# Altium PCB mini_backplane.PcbDoc (part 1 of 5)
Units mm, origin at the board's own origin, x right, y up, seen from the top; angles counter-clockwise.
Board outline 232.03 x 195 mm, 4 copper layers (Top Layer, GND, POWER, Bottom Layer); 241 components, 200 nets, 1637 pads, 676 vias.
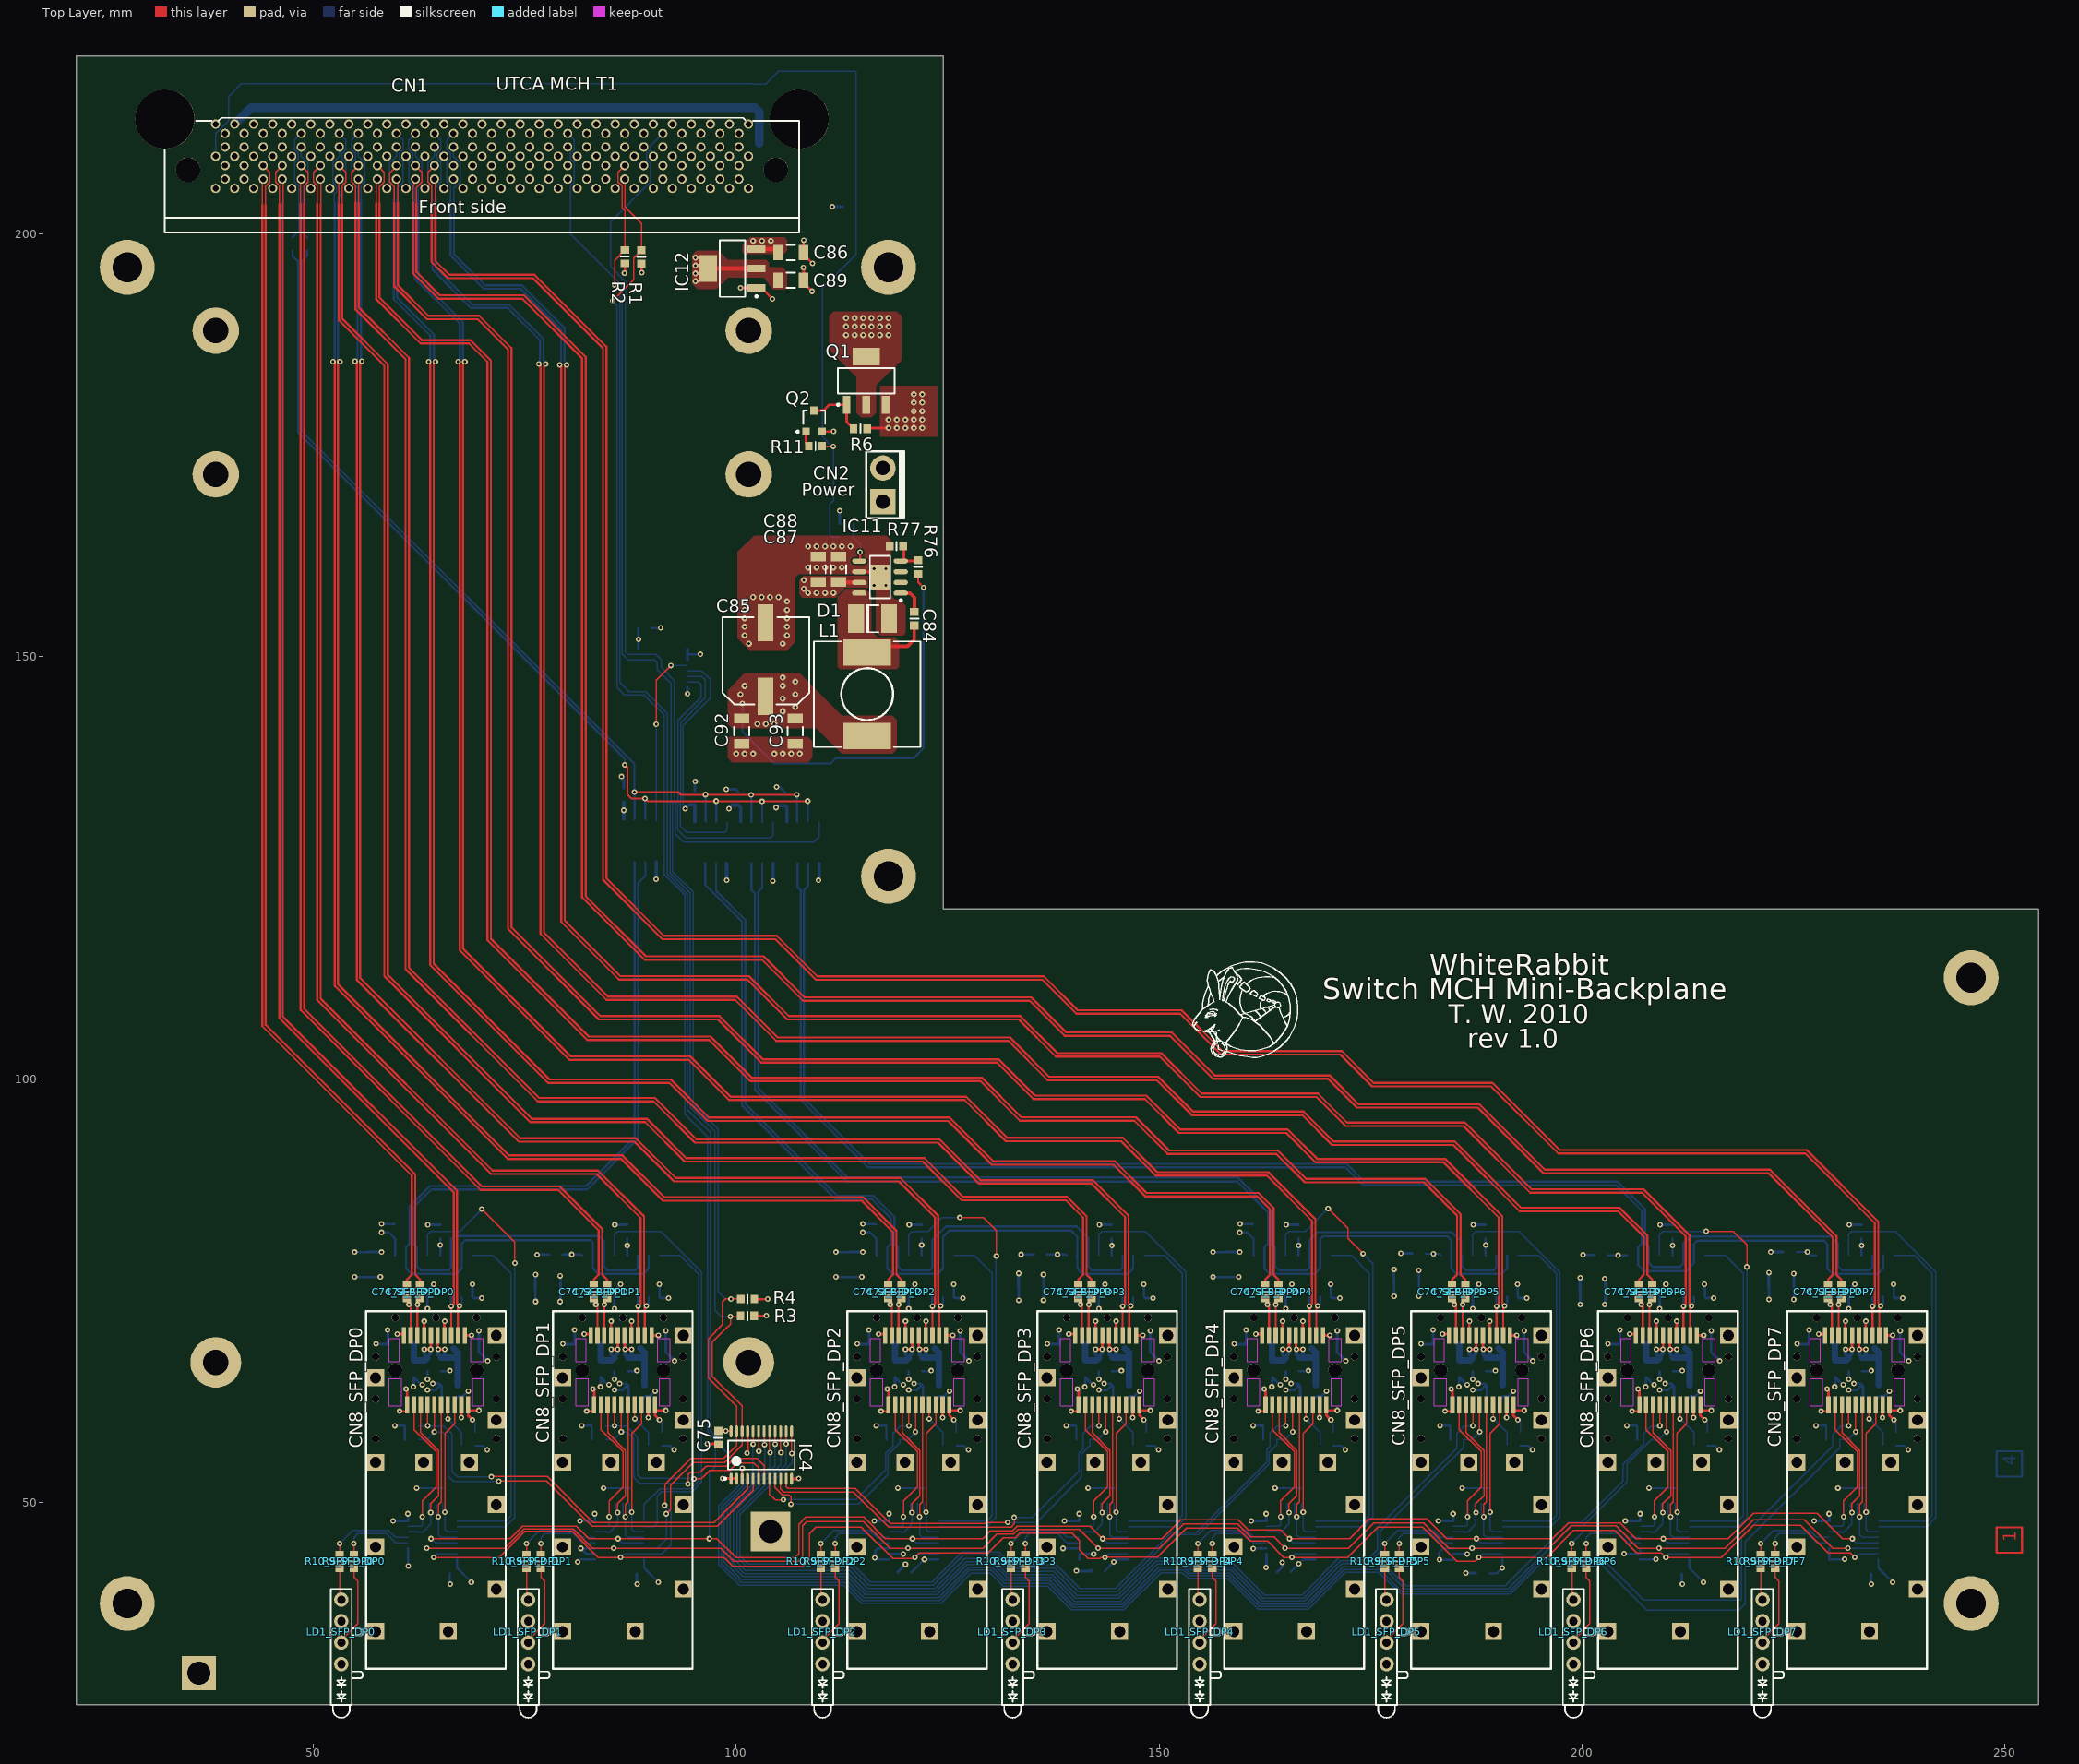
[diagram p0: Top Layer view]
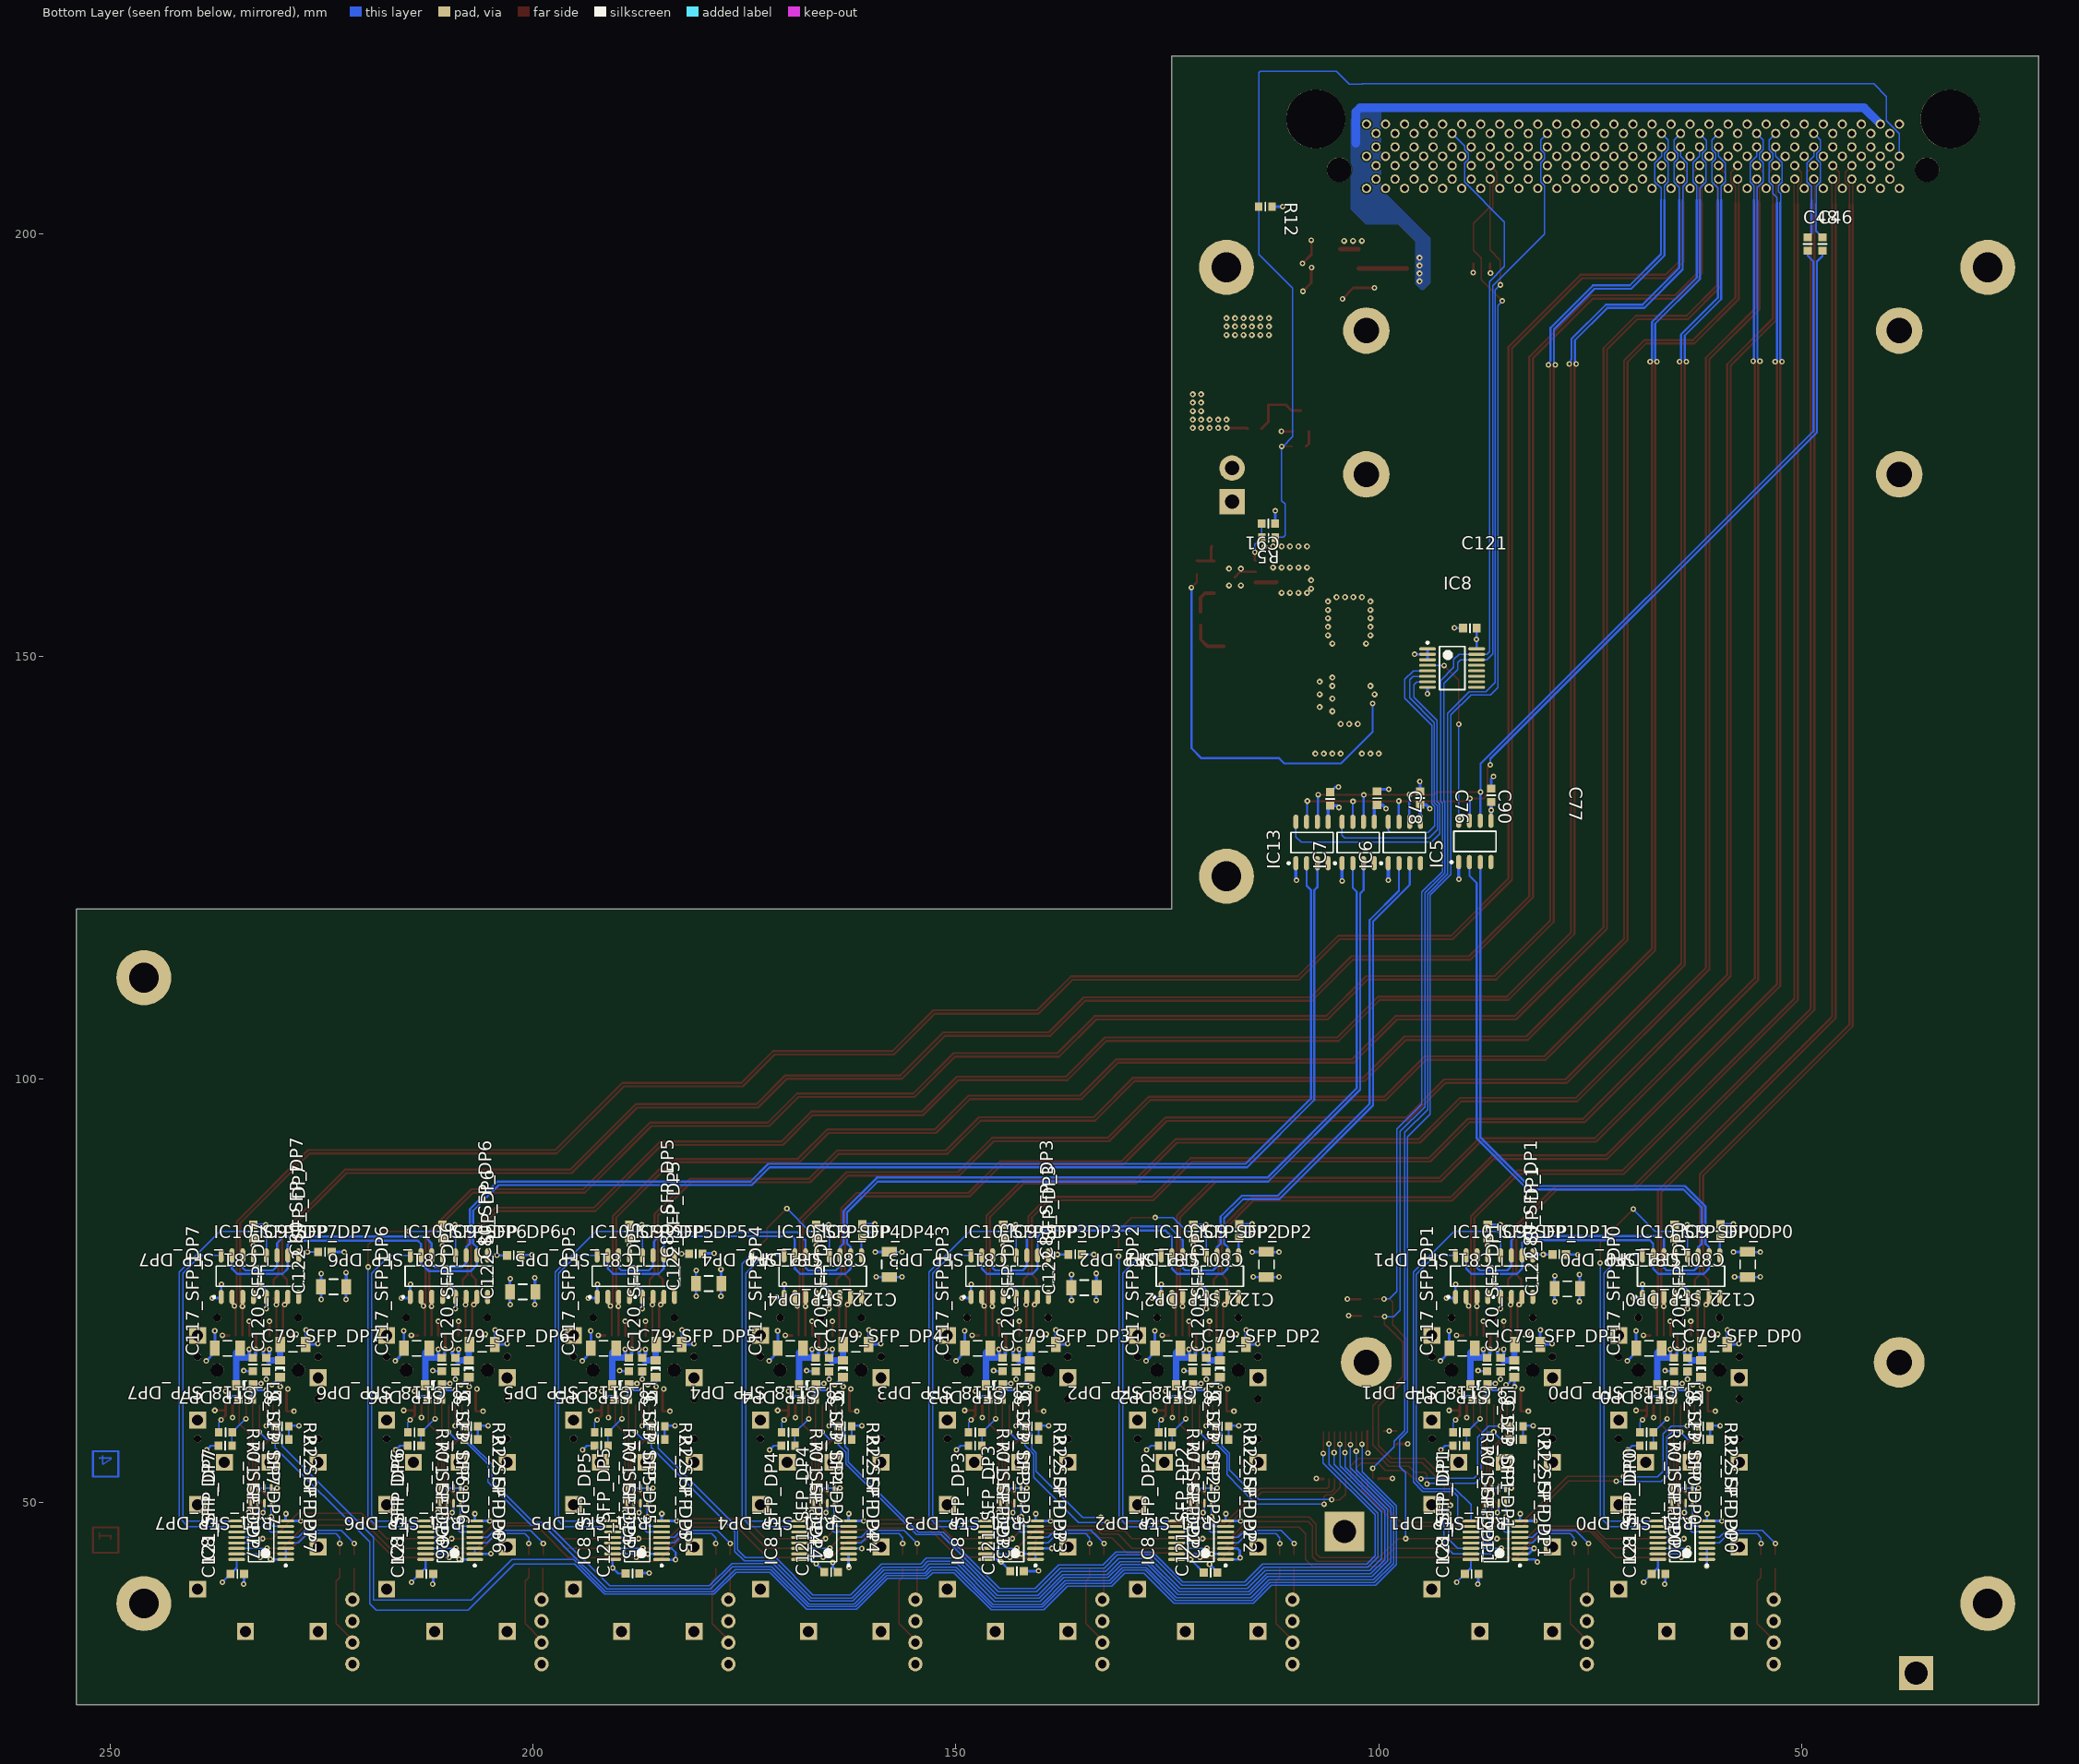
[diagram p1: Bottom Layer view, seen from below]
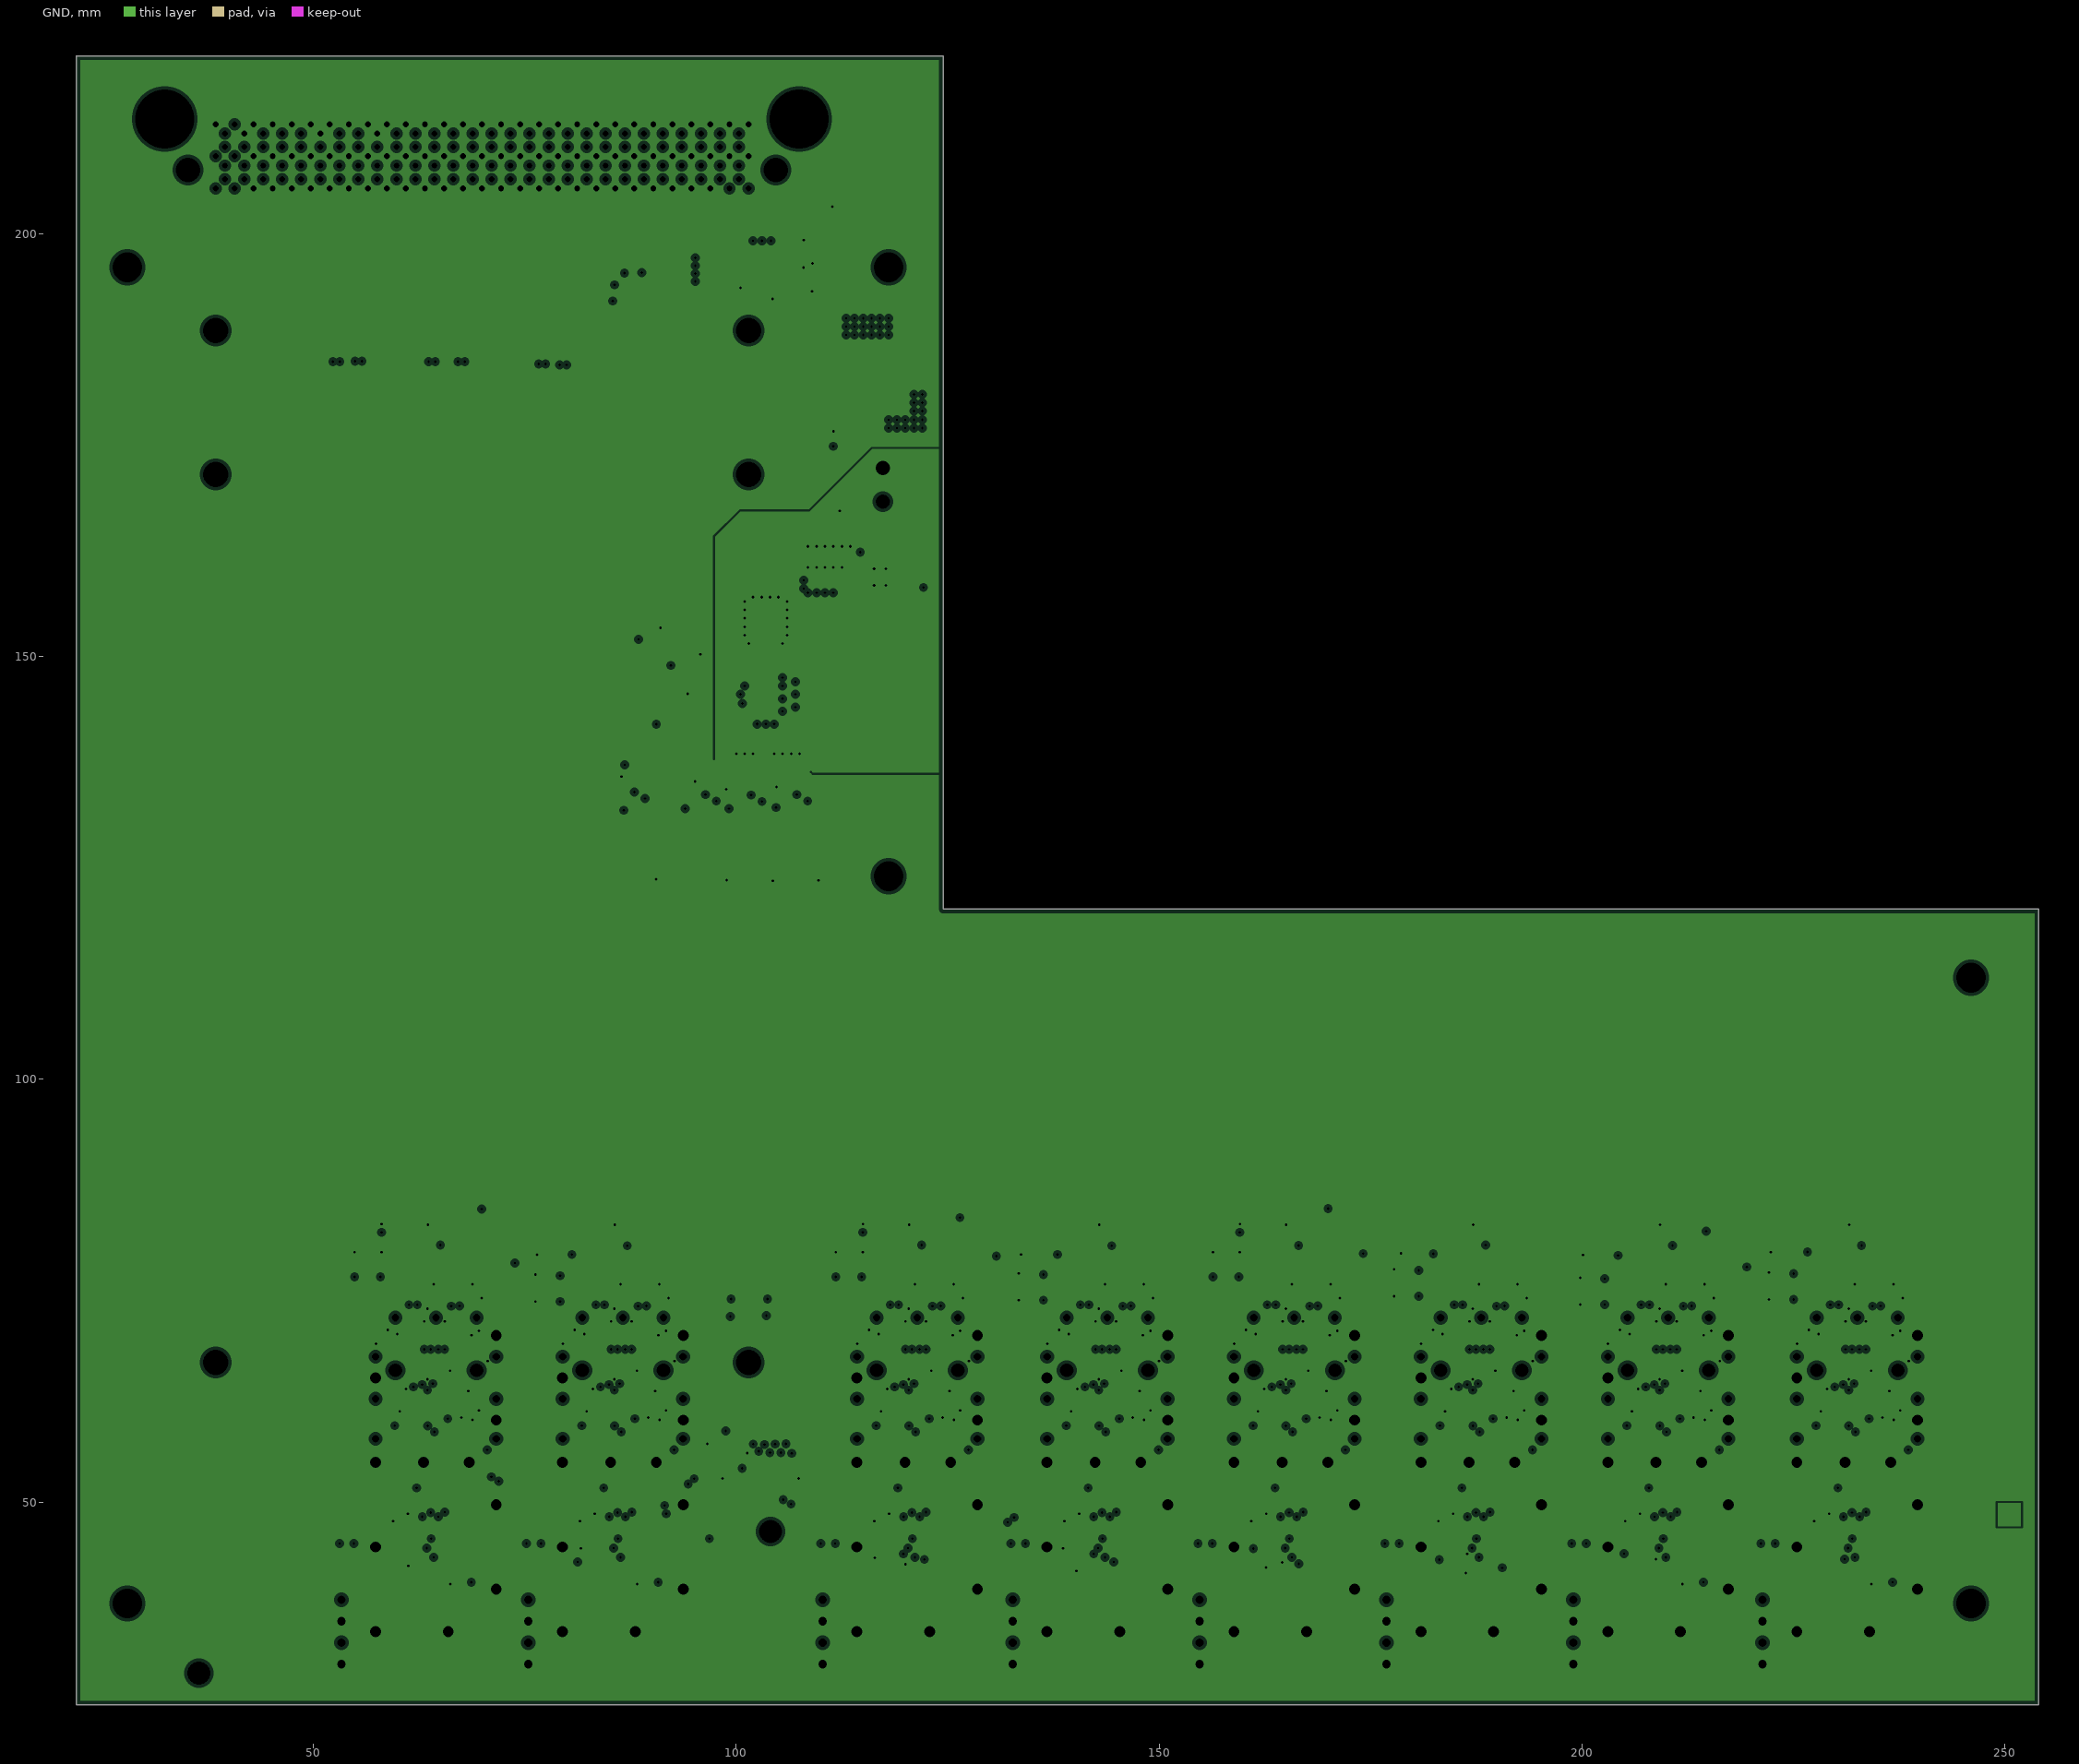
[diagram p2: GND, clearances drawn from the general rule]
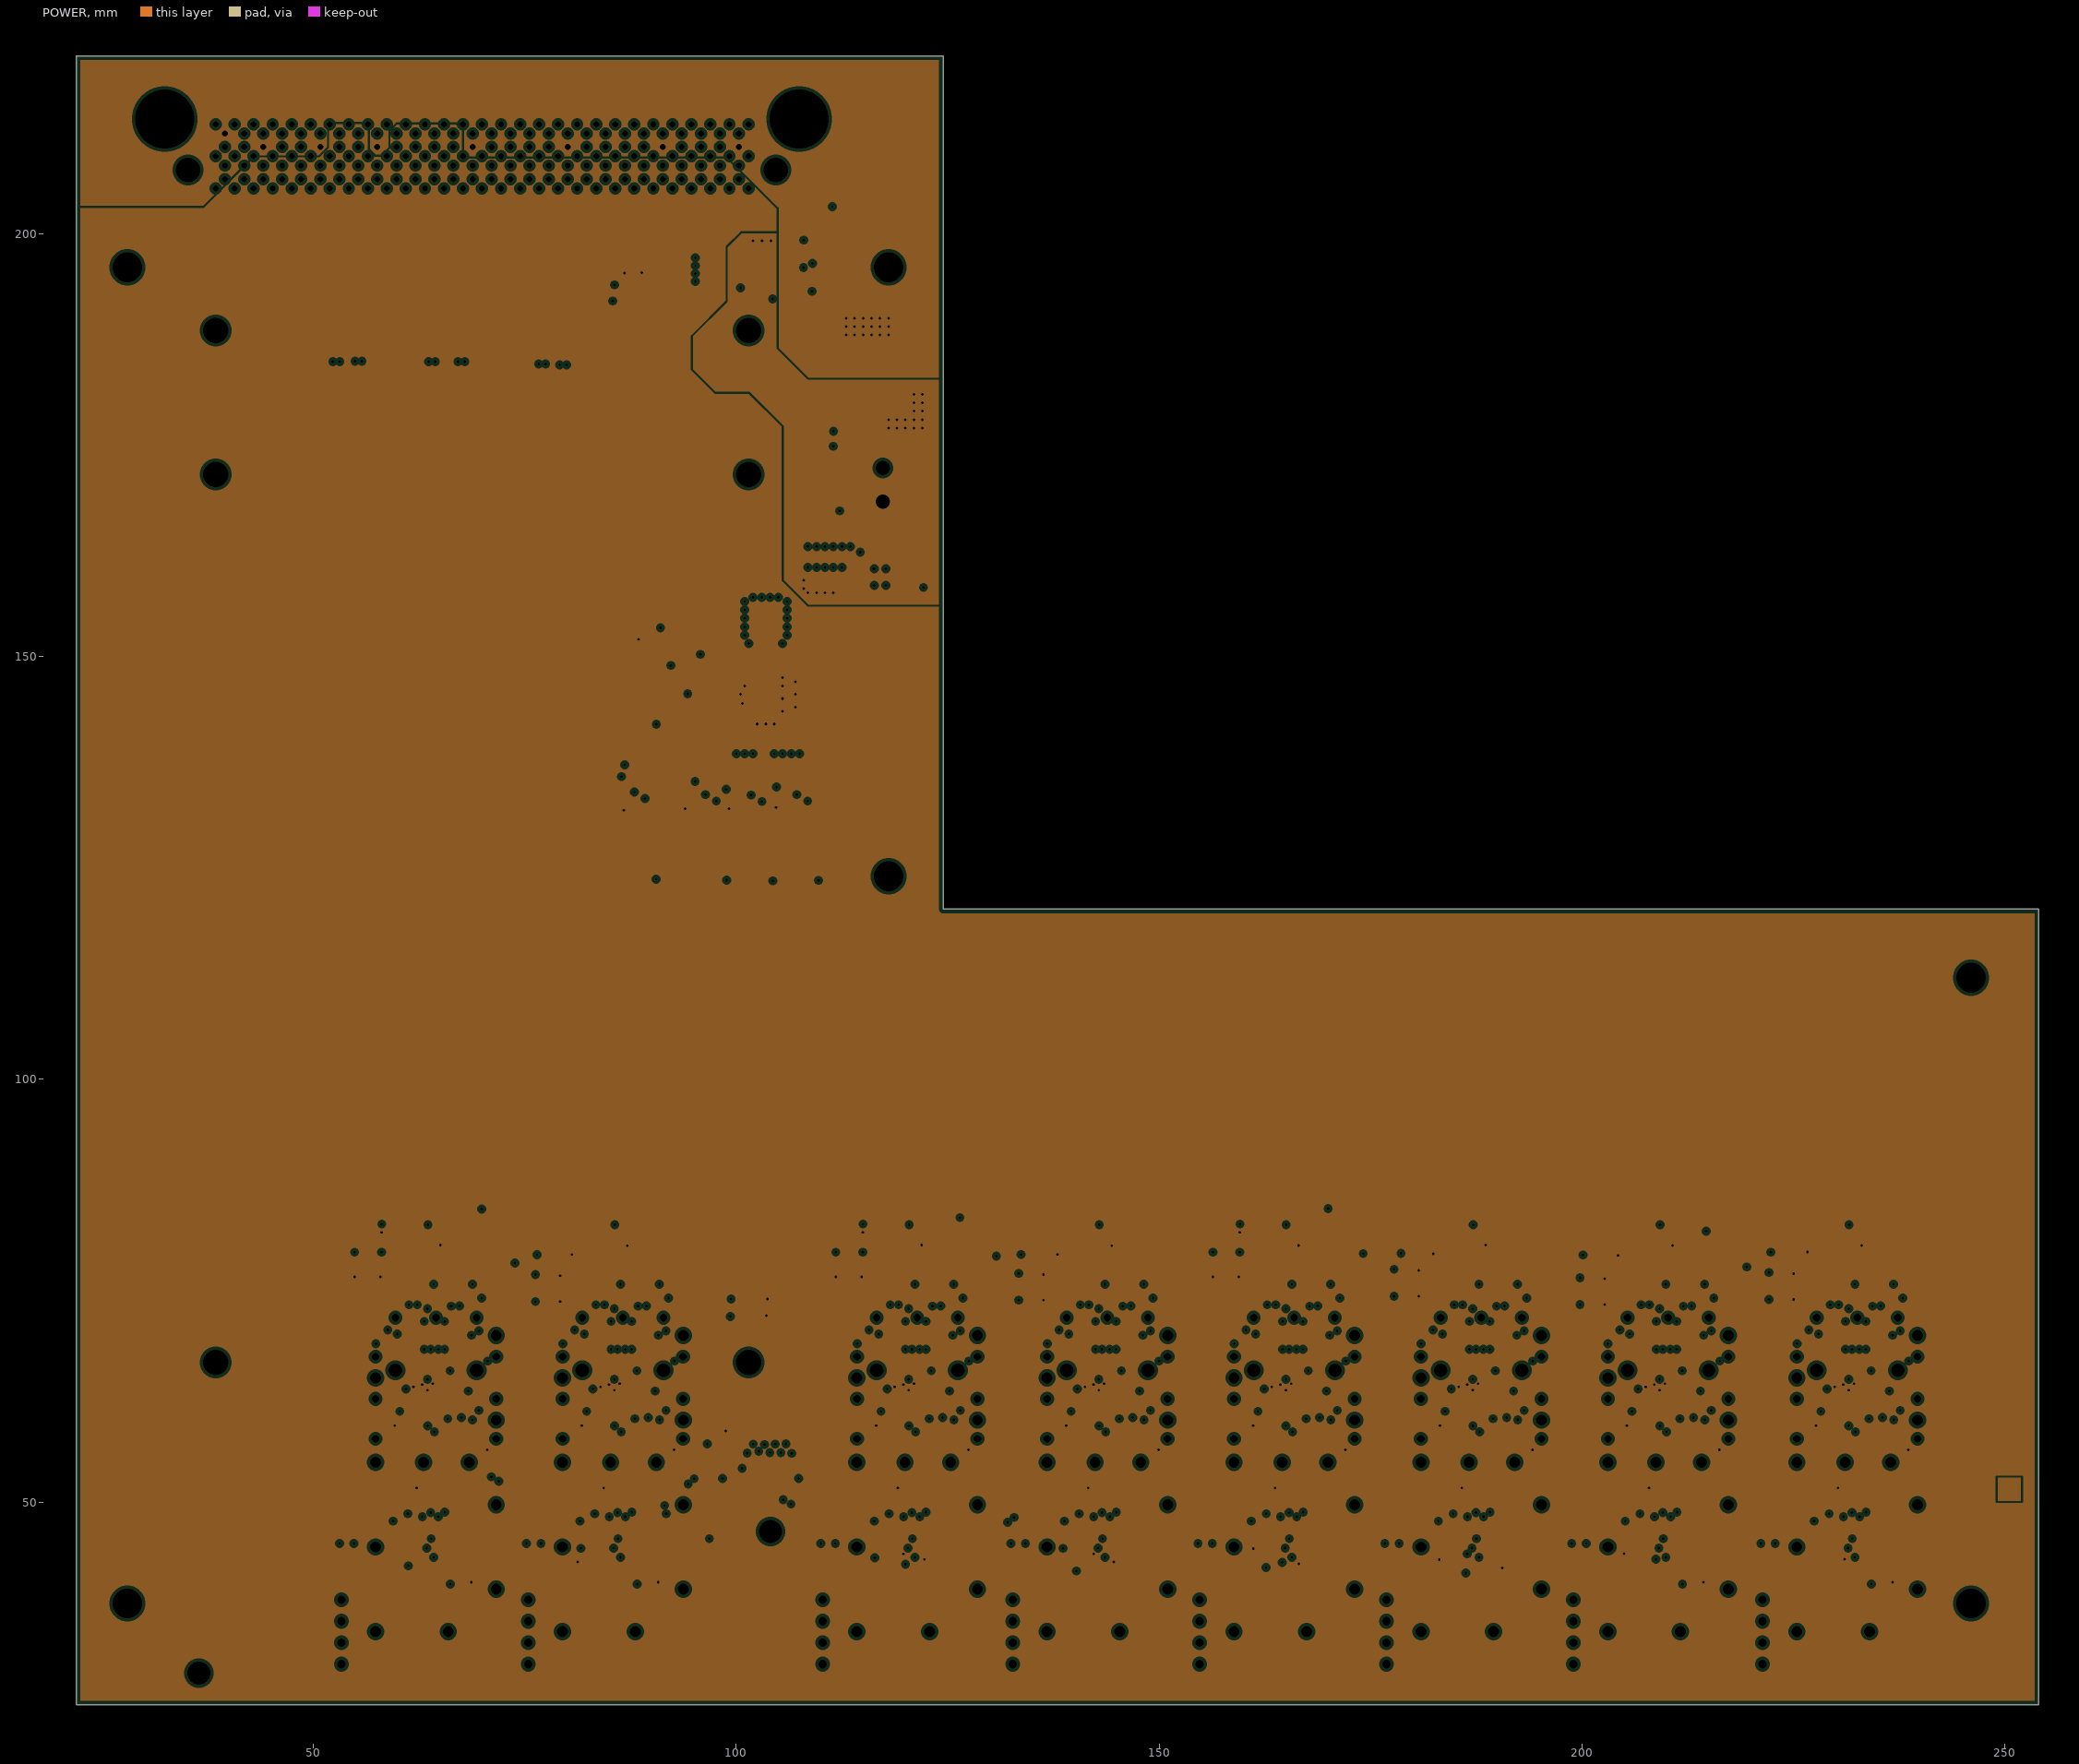
[diagram p3: POWER, clearances drawn from the general rule]
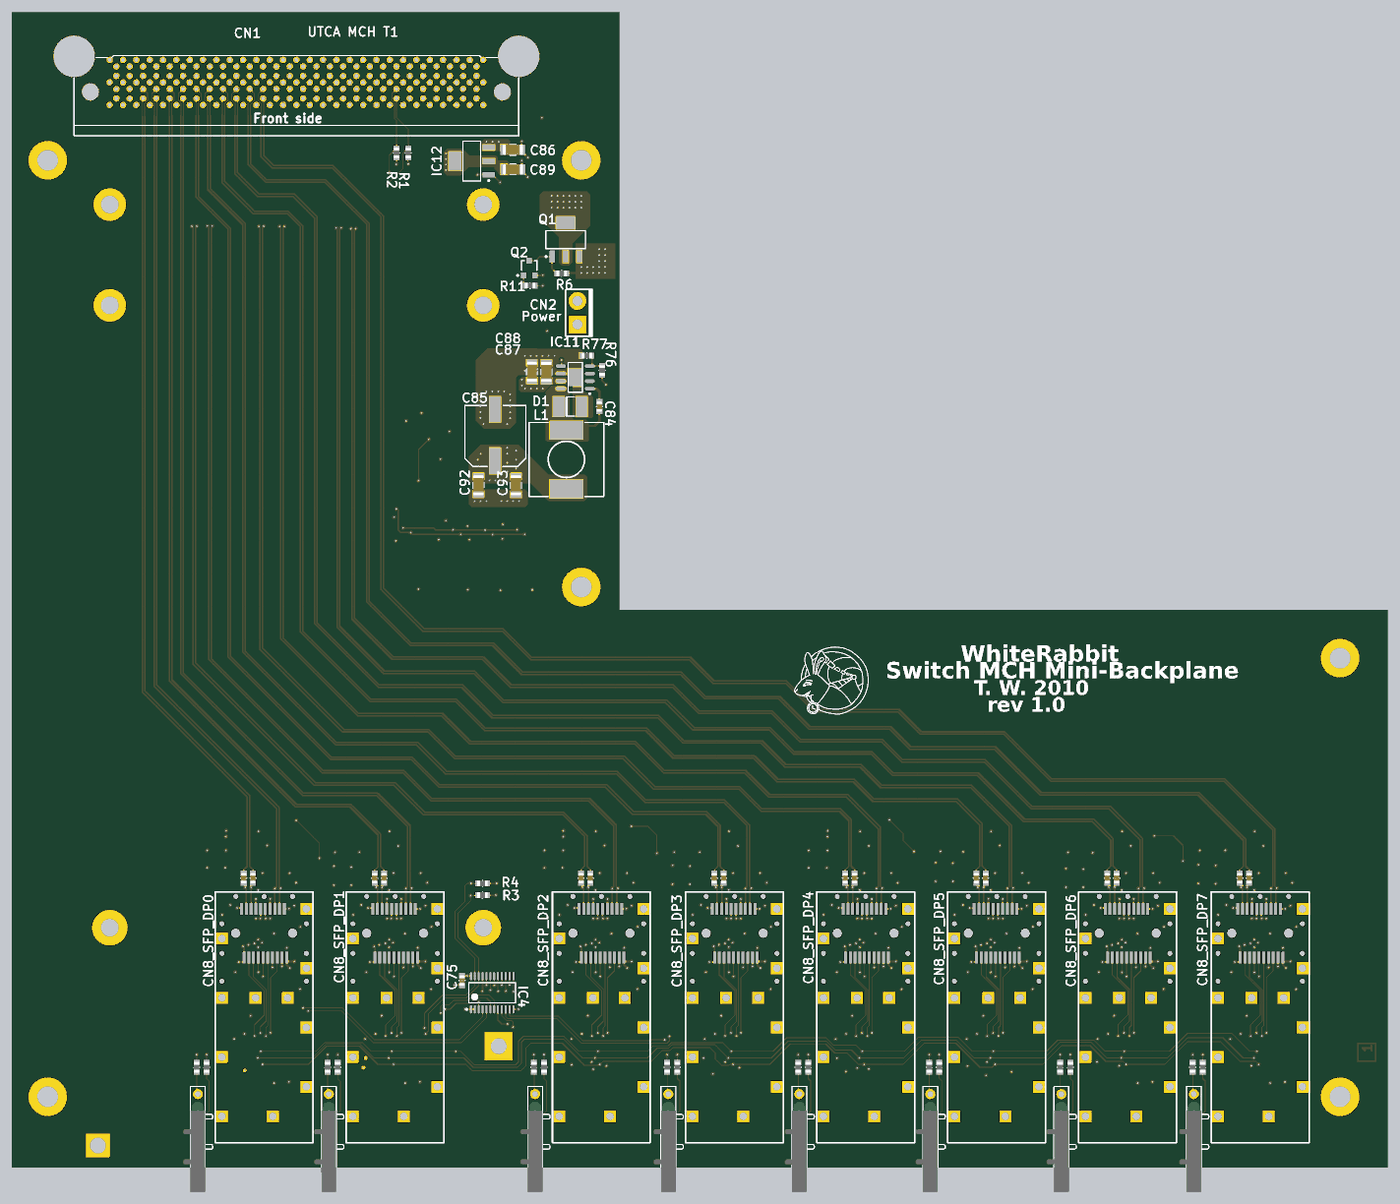
[diagram p8: 3D render of the assembled board from above, using the file's embedded part models]
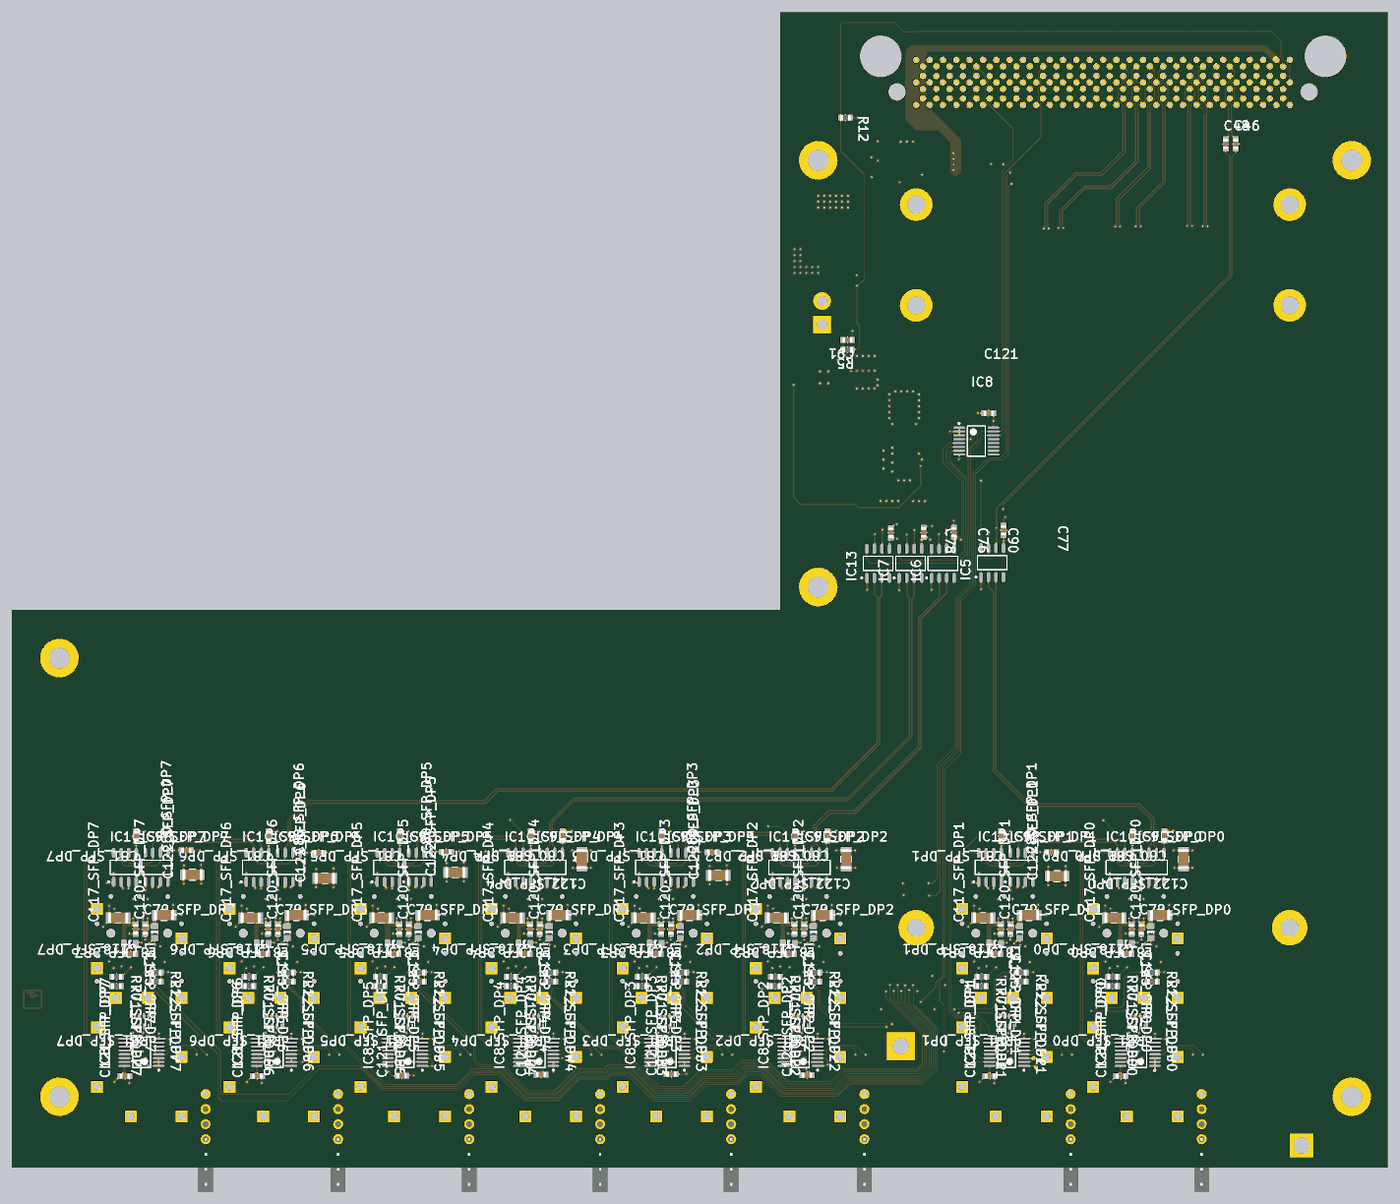
[diagram p9: 3D render of the assembled board from below, using the file's embedded part models]

## Layer stack, top to bottom
Top Layer: signal copper 0.0356
Dielectric: core 0.32, FR-4, Dk 4.8
GND: plane copper 0.0356, net GND
Dielectric: prepreg 0.32, FR-4, Dk 4.8
POWER: plane copper 0.0356, net (Multiple Nets)
Dielectric: core 0.32, FR-4, Dk 4.8
Bottom Layer: signal copper 0.0356

## Board outline
21.971,26.01 21.971,220.98 21.996,221.005 124.46,221.005 124.46,120.142 254,120.142 254,26.01

## Design rules (kind name [scope] priority, off if disabled: settings)
Clearance [All] p1: gap=0.152
DiffPairsRouting [All] p1: maxlimit=0.254 minlimit=0.152 mostfreqgap=0.254 toplayer_maxgap=0.152 toplayer_prefgap=0.152 bottomlayer_maxgap=0.152 bottomlayer_prefgap=0.152 maxuncoupledlength=12.7
HoleSize [All] p1: absolutevalues=TRUE maxlimit=5.08 minlimit=0.254 maxpercent=80.000 minpercent=20.000
MinimumSolderMaskSliver [All] p1: minsoldermaskwidth=0.051
PlaneClearance [All] p1: clearance=0.381
PlaneConnect [All] p1: planeconnectstyle=Direct reliefexpansion=0.508 reliefentries=4 reliefconductorwidth=0.254 reliefairgap=0.254
PolygonConnect PolygonConnect_via [All vs isvia] p1: connectstyle=Direct reliefconductorwidth=0.254 reliefentries=4 polygonreliefangle="90 Angle"
PolygonConnect [All] p2: connectstyle=Direct reliefconductorwidth=0.254 reliefentries=4 polygonreliefangle="90 Angle"
RoomDefinition U_power_supply [InComponentClass('U_power_supply')] p1: confinementstyle=ConfineIn formatcopy=TRUE lockcomponents=FALSE outline 94.513,200.635 123.723,200.635 123.723,136.322 94.513,136.322
RoomDefinition SFP_DP7 [InComponentClass('SFP_DP7')] p2: confinementstyle=ConfineIn formatcopy=TRUE lockcomponents=FALSE outline 219.964,26.035 242.062,26.035 242.062,84.633 219.964,84.633
RoomDefinition SFP_DP0 [InComponentClass('SFP_DP0')] p3: confinementstyle=ConfineIn formatcopy=TRUE lockcomponents=TRUE outline 51.943,26.035 74.041,26.035 74.041,84.633 51.943,84.633
RoomDefinition SFP_DP1 [InComponentClass('SFP_DP1')] p4: confinementstyle=ConfineIn formatcopy=TRUE lockcomponents=FALSE outline 74.041,26.035 96.139,26.035 96.139,84.633 74.041,84.633
RoomDefinition U_i2c_stuff [InComponentClass('U_i2c_stuff')] p5: confinementstyle=ConfineIn formatcopy=TRUE lockcomponents=FALSE outline 96.545,43.129 107.95,43.129 107.95,76.759 96.545,76.759
RoomDefinition SFP_DP6 [InComponentClass('SFP_DP6')] p6: confinementstyle=ConfineIn formatcopy=TRUE lockcomponents=FALSE outline 197.612,26.035 219.71,26.035 219.71,84.633 197.612,84.633
RoomDefinition SFP_DP5 [InComponentClass('SFP_DP5')] p7: confinementstyle=ConfineIn formatcopy=TRUE lockcomponents=FALSE outline 175.514,26.035 197.612,26.035 197.612,84.633 175.514,84.633
RoomDefinition SFP_DP4 [InComponentClass('SFP_DP4')] p8: confinementstyle=ConfineIn formatcopy=TRUE lockcomponents=FALSE outline 153.416,26.035 175.514,26.035 175.514,84.633 153.416,84.633
RoomDefinition SFP_DP3 [InComponentClass('SFP_DP3')] p9: confinementstyle=ConfineIn formatcopy=TRUE lockcomponents=FALSE outline 131.318,26.035 153.416,26.035 153.416,84.633 131.318,84.633
RoomDefinition SFP_DP2 [InComponentClass('SFP_DP2')] p10: confinementstyle=ConfineIn formatcopy=TRUE lockcomponents=FALSE outline 108.839,26.035 130.937,26.035 130.937,84.633 108.839,84.633
RoutingVias [All] p1: holewidth=0.305 width=0.66 viastyle="Through Hole" minholewidth=0.305 minwidth=0.61 maxholewidth=2.54 maxwidth=2.54
SilkscreenOverComponentPads [All] p1: minsilkscreentomaskgap=0.254
SolderMaskExpansion [All] p1: expansion=0.102
TestPointUsage [All] p1: valid=0 allowmultiple=FALSE
Testpoint [All] p1: side=15 testpointundercomponent=TRUE minsize=1.016 maxsize=2.54 preferedsize=1.524 minholesize=0 maxholesize=1.016 preferedholesize=0.813 testpointgrid=0.025 style=1023 order=0-112345678
Width Width_DIFF [(InDifferentialPairClass('All Differential Pairs'))] p1: maxlimit=0.254 minlimit=0.152 preferedwidth=0.254
Width [All] p2: maxlimit=2.54 minlimit=0.152 preferedwidth=0.152
18 further rules are at their usual default settings.

## Classes and differential pairs
component class U_power_supply: C84 C85 C86 C87 C88 C89 C91 C92 C93 CN2 D1 IC11 IC12 L1 Q1 Q2 R5 R6 R11 R12 R76 R77
component class U_i2c_stuff: C75 C121 IC4 IC8 R2 R3 R4
channel class sfp_wrapper: SFP_DP0 SFP_DP1 SFP_DP2 SFP_DP3 SFP_DP4 SFP_DP5 SFP_DP6 SFP_DP7
component class SFP_DP7: C73_SFP_DP7 C74_SFP_DP7 C79_SFP_DP7 C80_SFP_DP7 C81_SFP_DP7 C117_SFP_DP7 C118_SFP_DP7 C120_SFP_DP7 C121_SFP_DP7 C122_SFP_DP7 C123_SFP_DP7 CN8_SFP_DP7 IC8_SFP_DP7 IC9_SFP_DP7 IC10_SFP_DP7 L8_SFP_DP7 L9_SFP_DP7 LD1_SFP_DP7 R9_SFP_DP7 R10_SFP_DP7 R21_SFP_DP7 R22_SFP_DP7 R70_SFP_DP7 R71_SFP_DP7 RP1_SFP_DP7
component class SFP_DP6: C73_SFP_DP6 C74_SFP_DP6 C79_SFP_DP6 C80_SFP_DP6 C81_SFP_DP6 C117_SFP_DP6 C118_SFP_DP6 C120_SFP_DP6 C121_SFP_DP6 C122_SFP_DP6 C123_SFP_DP6 CN8_SFP_DP6 IC8_SFP_DP6 IC9_SFP_DP6 IC10_SFP_DP6 L8_SFP_DP6 L9_SFP_DP6 LD1_SFP_DP6 R9_SFP_DP6 R10_SFP_DP6 R21_SFP_DP6 R22_SFP_DP6 R70_SFP_DP6 R71_SFP_DP6 RP1_SFP_DP6
component class SFP_DP5: C73_SFP_DP5 C74_SFP_DP5 C79_SFP_DP5 C80_SFP_DP5 C81_SFP_DP5 C117_SFP_DP5 C118_SFP_DP5 C120_SFP_DP5 C121_SFP_DP5 C122_SFP_DP5 C123_SFP_DP5 CN8_SFP_DP5 IC8_SFP_DP5 IC9_SFP_DP5 IC10_SFP_DP5 L8_SFP_DP5 L9_SFP_DP5 LD1_SFP_DP5 R9_SFP_DP5 R10_SFP_DP5 R21_SFP_DP5 R22_SFP_DP5 R70_SFP_DP5 R71_SFP_DP5 RP1_SFP_DP5
component class SFP_DP4: C73_SFP_DP4 C74_SFP_DP4 C79_SFP_DP4 C80_SFP_DP4 C81_SFP_DP4 C117_SFP_DP4 C118_SFP_DP4 C120_SFP_DP4 C121_SFP_DP4 C122_SFP_DP4 C123_SFP_DP4 CN8_SFP_DP4 IC8_SFP_DP4 IC9_SFP_DP4 IC10_SFP_DP4 L8_SFP_DP4 L9_SFP_DP4 LD1_SFP_DP4 R9_SFP_DP4 R10_SFP_DP4 R21_SFP_DP4 R22_SFP_DP4 R70_SFP_DP4 R71_SFP_DP4 RP1_SFP_DP4
component class SFP_DP3: C73_SFP_DP3 C74_SFP_DP3 C79_SFP_DP3 C80_SFP_DP3 C81_SFP_DP3 C117_SFP_DP3 C118_SFP_DP3 C120_SFP_DP3 C121_SFP_DP3 C122_SFP_DP3 C123_SFP_DP3 CN8_SFP_DP3 IC8_SFP_DP3 IC9_SFP_DP3 IC10_SFP_DP3 L8_SFP_DP3 L9_SFP_DP3 LD1_SFP_DP3 R9_SFP_DP3 R10_SFP_DP3 R21_SFP_DP3 R22_SFP_DP3 R70_SFP_DP3 R71_SFP_DP3 RP1_SFP_DP3
component class SFP_DP2: C73_SFP_DP2 C74_SFP_DP2 C79_SFP_DP2 C80_SFP_DP2 C81_SFP_DP2 C117_SFP_DP2 C118_SFP_DP2 C120_SFP_DP2 C121_SFP_DP2 C122_SFP_DP2 C123_SFP_DP2 CN8_SFP_DP2 IC8_SFP_DP2 IC9_SFP_DP2 IC10_SFP_DP2 L8_SFP_DP2 L9_SFP_DP2 LD1_SFP_DP2 R9_SFP_DP2 R10_SFP_DP2 R21_SFP_DP2 R22_SFP_DP2 R70_SFP_DP2 R71_SFP_DP2 RP1_SFP_DP2
component class SFP_DP1: C73_SFP_DP1 C74_SFP_DP1 C79_SFP_DP1 C80_SFP_DP1 C81_SFP_DP1 C117_SFP_DP1 C118_SFP_DP1 C120_SFP_DP1 C121_SFP_DP1 C122_SFP_DP1 C123_SFP_DP1 CN8_SFP_DP1 IC8_SFP_DP1 IC9_SFP_DP1 IC10_SFP_DP1 L8_SFP_DP1 L9_SFP_DP1 LD1_SFP_DP1 R9_SFP_DP1 R10_SFP_DP1 R21_SFP_DP1 R22_SFP_DP1 R70_SFP_DP1 R71_SFP_DP1 RP1_SFP_DP1
component class SFP_DP0: C73_SFP_DP0 C74_SFP_DP0 C79_SFP_DP0 C80_SFP_DP0 C81_SFP_DP0 C117_SFP_DP0 C118_SFP_DP0 C120_SFP_DP0 C121_SFP_DP0 C122_SFP_DP0 C123_SFP_DP0 CN8_SFP_DP0 IC8_SFP_DP0 IC9_SFP_DP0 IC10_SFP_DP0 L8_SFP_DP0 L9_SFP_DP0 LD1_SFP_DP0 R9_SFP_DP0 R10_SFP_DP0 R21_SFP_DP0 R22_SFP_DP0 R70_SFP_DP0 R71_SFP_DP0 RP1_SFP_DP0
component class mini_backplane: C46 C48 C76 C77 C78 C90 C? CN1 IC5 IC6 IC7 IC13 R1
differential pair FB_MUXED: +FB_MUXED_P -FB_MUXED_N
differential pair FB_67: +FB_67_P -FB_67_N
differential pair FB_45: +FB_45_P -FB_45_N
differential pair FB_23: +FB_23_P -FB_23_N
differential pair FB_01: +FB_01_P -FB_01_N
differential pair SFP_TX6: +SFP_TX6_P -SFP_TX6_N
differential pair SFP_TX5: +SFP_TX5_P -SFP_TX5_N
differential pair SFP_TX4: +SFP_TX4_P -SFP_TX4_N
differential pair SFP_TX3: +SFP_TX3_P -SFP_TX3_N
differential pair SFP_TX2: +SFP_TX2_P -SFP_TX2_N
differential pair SFP_TX1: +SFP_TX1_P -SFP_TX1_N
differential pair SFP_TX0: +SFP_TX0_P -SFP_TX0_N
differential pair RD_OUT_SFP_DP6: +RD_OUT_SFP_DP6_P -RD_OUT_SFP_DP6_N
differential pair RD_OUT_SFP_DP5: +RD_OUT_SFP_DP5_P -RD_OUT_SFP_DP5_N
differential pair RD_OUT_SFP_DP4: +RD_OUT_SFP_DP4_P -RD_OUT_SFP_DP4_N
differential pair RD_OUT_SFP_DP3: +RD_OUT_SFP_DP3_P -RD_OUT_SFP_DP3_N
differential pair RD_OUT_SFP_DP2: +RD_OUT_SFP_DP2_P -RD_OUT_SFP_DP2_N
differential pair RD_OUT_SFP_DP1: +RD_OUT_SFP_DP1_P -RD_OUT_SFP_DP1_N
differential pair RD_OUT_SFP_DP0: +RD_OUT_SFP_DP0_P -RD_OUT_SFP_DP0_N
differential pair SFP_TX7: +SFP_TX7_P -SFP_TX7_N
differential pair RD_OUT_SFP_DP7: +RD_OUT_SFP_DP7_P -RD_OUT_SFP_DP7_N

## Components (designator, comment, footprint, x,y, rotation, side; value= is the part's Value field where it differs from the comment)
C46 "10n" CAPC1608X87N 47.549,198.755 r90 bottom
C48 "10n" CAPC1608X87N 49.276,198.755 r90 bottom
C73_SFP_DP0 "10n" CAPC1608X87N 62.636,74.879 r270 top (schematic designator C73)
C73_SFP_DP1 "10n" CAPC1608X87N 84.734,74.879 r270 top (schematic designator C73)
C73_SFP_DP2 "10n" CAPC1608X87N 119.532,74.879 r270 top (schematic designator C73)
C73_SFP_DP3 "10n" CAPC1608X87N 142.011,74.879 r270 top (schematic designator C73)
C73_SFP_DP4 "10n" CAPC1608X87N 164.109,74.879 r270 top (schematic designator C73)
C73_SFP_DP5 "10n" CAPC1608X87N 186.207,74.879 r270 top (schematic designator C73)
C73_SFP_DP6 "10n" CAPC1608X87N 208.305,74.879 r270 top (schematic designator C73)
C73_SFP_DP7 "10n" CAPC1608X87N 230.657,74.879 r270 top (schematic designator C73)
C74_SFP_DP0 "10n" CAPC1608X87N 61.062,74.879 r270 top (schematic designator C74)
C74_SFP_DP1 "10n" CAPC1608X87N 83.16,74.879 r270 top (schematic designator C74)
C74_SFP_DP2 "10n" CAPC1608X87N 117.958,74.879 r270 top (schematic designator C74)
C74_SFP_DP3 "10n" CAPC1608X87N 140.437,74.879 r270 top (schematic designator C74)
C74_SFP_DP4 "10n" CAPC1608X87N 162.535,74.879 r270 top (schematic designator C74)
C74_SFP_DP5 "10n" CAPC1608X87N 184.633,74.879 r270 top (schematic designator C74)
C74_SFP_DP6 "10n" CAPC1608X87N 206.731,74.879 r270 top (schematic designator C74)
C74_SFP_DP7 "10n" CAPC1608X87N 229.083,74.879 r270 top (schematic designator C74)
C75 "100n" CAPC1608X87N 97.892,57.607 r90 top
C76 "100n" CAPC1608X87N 100.203,133.223 r270 bottom
C77 "100n" CAPC1608X87N 86.716,133.579 r270 bottom
C78 "100n" CAPC1608X87N 105.74,133.147 r270 bottom
C79_SFP_DP0 "100n" CAPC1608X87N 63.5,66.243 r90 bottom (schematic designator C79)
C79_SFP_DP1 "100n" CAPC1608X87N 85.598,66.243 r90 bottom (schematic designator C79)
C79_SFP_DP2 "100n" CAPC1608X87N 120.396,66.243 r90 bottom (schematic designator C79)
C79_SFP_DP3 "100n" CAPC1608X87N 142.875,66.243 r90 bottom (schematic designator C79)
C79_SFP_DP4 "100n" CAPC1608X87N 164.973,66.243 r90 bottom (schematic designator C79)
C79_SFP_DP5 "100n" CAPC1608X87N 187.071,66.243 r90 bottom (schematic designator C79)
C79_SFP_DP6 "100n" CAPC1608X87N 209.169,66.243 r90 bottom (schematic designator C79)
C79_SFP_DP7 "100n" CAPC1608X87N 231.521,66.243 r90 bottom (schematic designator C79)
C80_SFP_DP0 "100n" CAPC1608X87N 59.588,82.042 r270 bottom (schematic designator C80)
C80_SFP_DP1 "100n" CAPC1608X87N 78.664,79.273 r0 bottom (schematic designator C80)
C80_SFP_DP2 "100n" CAPC1608X87N 116.484,82.042 r270 bottom (schematic designator C80)
C80_SFP_DP3 "100n" CAPC1608X87N 135.89,79.273 r0 bottom (schematic designator C80)
C80_SFP_DP4 "100n" CAPC1608X87N 161.061,82.042 r270 bottom (schematic designator C80)
C80_SFP_DP5 "100n" CAPC1608X87N 180.746,79.35 r0 bottom (schematic designator C80)
C80_SFP_DP6 "100n" CAPC1608X87N 202.26,79.172 r0 bottom (schematic designator C80)
C80_SFP_DP7 "100n" CAPC1608X87N 224.587,79.578 r0 bottom (schematic designator C80)
C81_SFP_DP0 "100n" CAPC1608X87N 65.024,81.991 r270 bottom (schematic designator C81)
C81_SFP_DP1 "100n" CAPC1608X87N 87.122,81.991 r270 bottom (schematic designator C81)
C81_SFP_DP2 "100n" CAPC1608X87N 121.92,81.991 r270 bottom (schematic designator C81)
C81_SFP_DP3 "100n" CAPC1608X87N 144.399,81.991 r270 bottom (schematic designator C81)
C81_SFP_DP4 "100n" CAPC1608X87N 166.497,81.991 r270 bottom (schematic designator C81)
C81_SFP_DP5 "100n" CAPC1608X87N 188.595,81.991 r270 bottom (schematic designator C81)
C81_SFP_DP6 "100n" CAPC1608X87N 210.693,81.991 r270 bottom (schematic designator C81)
C81_SFP_DP7 "100n" CAPC1608X87N 233.045,81.991 r270 bottom (schematic designator C81)
C84 "10n" CAPC1608X87N 121.056,154.457 r270 top
C85 "470u/6.3V OS-CON" OSCON_F12 103.454,149.631 r90 top
C86 "10u X7R" CAPC3216X140N 106.451,197.764 r180 top
C87 "10u X7R" CAPC3216X140N 109.677,160.325 r270 top
C88 "10u X7R" CAPC3216X140N 112.116,160.299 r270 top
C89 "10u X7R" CAPC3216X140N 106.477,194.462 r180 top
C90 "100n" CAPC1608X87N 95.123,133.248 r270 bottom
C91 "1u" CAPC1608X87N 113.055,165.684 r0 bottom
C92 "1u" CAPC3216X140N 100.66,141.173 r90 top
C93 "1u" CAPC3216X140N 106.985,141.173 r90 top
C117_SFP_DP0 "10u/6.3V X7R" CAPC3216X140N 68.072,68.174 r0 bottom (schematic designator C117)
C117_SFP_DP1 "10u/6.3V X7R" CAPC3216X140N 90.17,68.174 r0 bottom (schematic designator C117)
C117_SFP_DP2 "10u/6.3V X7R" CAPC3216X140N 124.968,68.174 r0 bottom (schematic designator C117)
C117_SFP_DP3 "10u/6.3V X7R" CAPC3216X140N 147.447,68.174 r0 bottom (schematic designator C117)
C117_SFP_DP4 "10u/6.3V X7R" CAPC3216X140N 169.545,68.174 r0 bottom (schematic designator C117)
C117_SFP_DP5 "10u/6.3V X7R" CAPC3216X140N 191.643,68.174 r0 bottom (schematic designator C117)
C117_SFP_DP6 "10u/6.3V X7R" CAPC3216X140N 213.741,68.174 r0 bottom (schematic designator C117)
C117_SFP_DP7 "10u/6.3V X7R" CAPC3216X140N 236.093,68.174 r0 bottom (schematic designator C117)
C118_SFP_DP0 "100n" CAPC1608X87N 65.1,66.269 r270 bottom (schematic designator C118)
C118_SFP_DP1 "100n" CAPC1608X87N 87.198,66.269 r270 bottom (schematic designator C118)
C118_SFP_DP2 "100n" CAPC1608X87N 121.996,66.269 r270 bottom (schematic designator C118)
C118_SFP_DP3 "100n" CAPC1608X87N 144.475,66.269 r270 bottom (schematic designator C118)
C118_SFP_DP4 "100n" CAPC1608X87N 166.573,66.269 r270 bottom (schematic designator C118)
C118_SFP_DP5 "100n" CAPC1608X87N 188.671,66.269 r270 bottom (schematic designator C118)
C118_SFP_DP6 "100n" CAPC1608X87N 210.769,66.269 r270 bottom (schematic designator C118)
C118_SFP_DP7 "100n" CAPC1608X87N 233.121,66.269 r270 bottom (schematic designator C118)
C120_SFP_DP0 "10u/6.3V X7R" CAPC3216X140N 60.325,68.656 r0 bottom (schematic designator C120)
C120_SFP_DP1 "10u/6.3V X7R" CAPC3216X140N 82.423,68.656 r0 bottom (schematic designator C120)
C120_SFP_DP2 "10u/6.3V X7R" CAPC3216X140N 117.221,68.656 r0 bottom (schematic designator C120)
C120_SFP_DP3 "10u/6.3V X7R" CAPC3216X140N 139.7,68.656 r0 bottom (schematic designator C120)
C120_SFP_DP4 "10u/6.3V X7R" CAPC3216X140N 161.798,68.656 r0 bottom (schematic designator C120)
C120_SFP_DP5 "10u/6.3V X7R" CAPC3216X140N 183.896,68.656 r0 bottom (schematic designator C120)
C120_SFP_DP6 "10u/6.3V X7R" CAPC3216X140N 205.994,68.656 r0 bottom (schematic designator C120)
C120_SFP_DP7 "10u/6.3V X7R" CAPC3216X140N 228.346,68.656 r0 bottom (schematic designator C120)
C121 "100n" CAPC1608X87N 89.23,153.34 r180 bottom
C121_SFP_DP0 "100n" CAPC1608X87N 66.929,41.504 r0 bottom (schematic designator C121)
C121_SFP_DP1 "100n" CAPC1608X87N 89.027,41.504 r0 bottom (schematic designator C121)
C121_SFP_DP2 "100n" CAPC1608X87N 119.888,41.656 r0 bottom (schematic designator C121)
C121_SFP_DP3 "100n" CAPC1608X87N 142.773,41.834 r0 bottom (schematic designator C121)
C121_SFP_DP4 "100n" CAPC1608X87N 164.744,41.732 r0 bottom (schematic designator C121)
C121_SFP_DP5 "100n" CAPC1608X87N 188.239,41.554 r0 bottom (schematic designator C121)
C121_SFP_DP6 "100n" CAPC1608X87N 212.598,41.504 r0 bottom (schematic designator C121)
C121_SFP_DP7 "100n" CAPC1608X87N 234.95,41.504 r0 bottom (schematic designator C121)
C122_SFP_DP0 "10u/6.3V X7R" CAPC3216X140N 56.388,78.105 r270 bottom (schematic designator C122)
C122_SFP_DP1 "10u/6.3V X7R" CAPC3216X140N 77.724,75.209 r0 bottom (schematic designator C122)
C122_SFP_DP2 "10u/6.3V X7R" CAPC3216X140N 113.284,78.105 r270 bottom (schematic designator C122)
C122_SFP_DP3 "10u/6.3V X7R" CAPC3216X140N 134.849,75.362 r0 bottom (schematic designator C122)
C122_SFP_DP4 "10u/6.3V X7R" CAPC3216X140N 157.861,78.105 r270 bottom (schematic designator C122)
C122_SFP_DP5 "10u/6.3V X7R" CAPC3216X140N 179.222,75.844 r0 bottom (schematic designator C122)
C122_SFP_DP6 "10u/6.3V X7R" CAPC3216X140N 201.219,74.854 r0 bottom (schematic designator C122)
C122_SFP_DP7 "10u/6.3V X7R" CAPC3216X140N 223.545,75.463 r0 bottom (schematic designator C122)
C123_SFP_DP0 "100n" CAPC1608X87N 65.989,62.103 r180 bottom (schematic designator C123)
C123_SFP_DP1 "100n" CAPC1608X87N 88.087,62.103 r180 bottom (schematic designator C123)
C123_SFP_DP2 "100n" CAPC1608X87N 122.885,62.103 r180 bottom (schematic designator C123)
C123_SFP_DP3 "100n" CAPC1608X87N 145.364,62.103 r180 bottom (schematic designator C123)
C123_SFP_DP4 "100n" CAPC1608X87N 167.462,62.103 r180 bottom (schematic designator C123)
C123_SFP_DP5 "100n" CAPC1608X87N 189.56,62.103 r180 bottom (schematic designator C123)
C123_SFP_DP6 "100n" CAPC1608X87N 211.658,62.103 r180 bottom (schematic designator C123)
C123_SFP_DP7 "100n" CAPC1608X87N 234.01,62.103 r180 bottom (schematic designator C123)
CN1 "UTCA MCH T1" CON_AMC_MOLEX_75800_00001_REVERSE 69.952,205.334 r0 top locked
CN2 "Power" CON_3.96_2 117.348,168.3 r90 top
CN8_SFP_DP0 "SFP Module socket" SFP_SINGLE_PORT 57.379,64.694 r0 top (schematic designator CN8)
CN8_SFP_DP1 "SFP Module socket" SFP_SINGLE_PORT 79.477,64.694 r0 top locked (schematic designator CN8)
CN8_SFP_DP2 "SFP Module socket" SFP_SINGLE_PORT 114.275,64.694 r0 top (schematic designator CN8)
CN8_SFP_DP3 "SFP Module socket" SFP_SINGLE_PORT 136.754,64.694 r0 top (schematic designator CN8)
CN8_SFP_DP4 "SFP Module socket" SFP_SINGLE_PORT 158.852,64.694 r0 top (schematic designator CN8)
CN8_SFP_DP5 "SFP Module socket" SFP_SINGLE_PORT 180.95,64.694 r0 top (schematic designator CN8)
CN8_SFP_DP6 "SFP Module socket" SFP_SINGLE_PORT 203.048,64.694 r0 top (schematic designator CN8)
CN8_SFP_DP7 "SFP Module socket" SFP_SINGLE_PORT 225.4,64.694 r0 top locked (schematic designator CN8)
D1 "RSX510L-20" CD4532-1812 116.129,154.457 r180 top
IC4 "PCA9548A" TSOP65P640-24AL 102.972,55.55 r90 top
IC5 "DS90LV001" SOIC127P600-8AL 88.646,128.118 r90 bottom
IC6 "DS90LV001" SOIC127P600-8AL 96.977,127.991 r90 bottom
IC7 "DS90LV001" SOIC127P600-8AL 102.438,127.991 r90 bottom
IC8 "PCA9534A" TSOP65P640-16AM 91.338,148.615 r180 bottom
IC8_SFP_DP0 "PCA9534" TSOP65P640-16AM 64.11,45.491 r0 bottom (schematic designator IC8)
IC8_SFP_DP1 "PCA9534" TSOP65P640-16AM 86.208,45.491 r0 bottom (schematic designator IC8)
IC8_SFP_DP2 "PCA9534" TSOP65P640-16AM 121.006,45.491 r0 bottom (schematic designator IC8)
IC8_SFP_DP3 "PCA9534" TSOP65P640-16AM 143.485,45.491 r0 bottom (schematic designator IC8)
IC8_SFP_DP4 "PCA9534" TSOP65P640-16AM 165.583,45.491 r0 bottom (schematic designator IC8)
IC8_SFP_DP5 "PCA9534" TSOP65P640-16AM 187.681,45.491 r0 bottom (schematic designator IC8)
IC8_SFP_DP6 "PCA9534" TSOP65P640-16AM 209.779,45.491 r0 bottom (schematic designator IC8)
IC8_SFP_DP7 "PCA9534" TSOP65P640-16AM 232.131,45.491 r0 bottom (schematic designator IC8)
IC9_SFP_DP0 "DS90LV001" SOIC127P600-8AL 61.595,76.708 r90 bottom (schematic designator IC9)
IC9_SFP_DP1 "DS90LV001" SOIC127P600-8AL 83.693,76.708 r90 bottom (schematic designator IC9)
IC9_SFP_DP2 "DS90LV001" SOIC127P600-8AL 118.491,76.708 r90 bottom (schematic designator IC9)
IC9_SFP_DP3 "DS90LV001" SOIC127P600-8AL 140.97,76.708 r90 bottom (schematic designator IC9)
IC9_SFP_DP4 "DS90LV001" SOIC127P600-8AL 163.068,76.708 r90 bottom (schematic designator IC9)
IC9_SFP_DP5 "DS90LV001" SOIC127P600-8AL 185.166,76.708 r90 bottom (schematic designator IC9)
IC9_SFP_DP6 "DS90LV001" SOIC127P600-8AL 207.264,76.708 r90 bottom (schematic designator IC9)
IC9_SFP_DP7 "DS90LV001" SOIC127P600-8AL 229.616,76.708 r90 bottom (schematic designator IC9)
IC10_SFP_DP0 "DS90LV001" SOIC127P600-8AL 66.929,76.708 r90 bottom (schematic designator IC10)
IC10_SFP_DP1 "DS90LV001" SOIC127P600-8AL 89.027,76.708 r90 bottom (schematic designator IC10)
IC10_SFP_DP2 "DS90LV001" SOIC127P600-8AL 123.825,76.708 r90 bottom (schematic designator IC10)
IC10_SFP_DP3 "DS90LV001" SOIC127P600-8AL 146.304,76.708 r90 bottom (schematic designator IC10)
IC10_SFP_DP4 "DS90LV001" SOIC127P600-8AL 168.402,76.708 r90 bottom (schematic designator IC10)
IC10_SFP_DP5 "DS90LV001" SOIC127P600-8AL 190.5,76.708 r90 bottom (schematic designator IC10)
IC10_SFP_DP6 "DS90LV001" SOIC127P600-8AL 212.598,76.708 r90 bottom (schematic designator IC10)
IC10_SFP_DP7 "DS90LV001" SOIC127P600-8AL 234.95,76.708 r90 bottom (schematic designator IC10)
IC11 "TPS5430" SOIC127P600-8AL_POWERPAD 117.004,159.375 r180 top
IC12 "LM1117-3.3" SOT223-4L 99.543,195.859 r180 top
IC13 "DS90LV001" SOIC127P600-8AL 107.899,127.991 r90 bottom
L1 "33 uH" IND0943-B 115.494,152.07 r270 top
L8_SFP_DP0 "Inductor" INDC2012-0805 61.9,65.761 r270 bottom (schematic designator L8)
L8_SFP_DP1 "Inductor" INDC2012-0805 83.998,65.761 r270 bottom (schematic designator L8)
L8_SFP_DP2 "Inductor" INDC2012-0805 118.796,65.761 r270 bottom (schematic designator L8)
L8_SFP_DP3 "Inductor" INDC2012-0805 141.275,65.761 r270 bottom (schematic designator L8)
L8_SFP_DP4 "Inductor" INDC2012-0805 163.373,65.761 r270 bottom (schematic designator L8)
L8_SFP_DP5 "Inductor" INDC2012-0805 185.471,65.761 r270 bottom (schematic designator L8)
L8_SFP_DP6 "Inductor" INDC2012-0805 207.569,65.761 r270 bottom (schematic designator L8)
L8_SFP_DP7 "Inductor" INDC2012-0805 229.921,65.761 r270 bottom (schematic designator L8)
L9_SFP_DP0 "Inductor" INDC2012-0805 66.065,63.83 r180 bottom (schematic designator L9)
L9_SFP_DP1 "Inductor" INDC2012-0805 88.163,63.83 r180 bottom (schematic designator L9)
L9_SFP_DP2 "Inductor" INDC2012-0805 122.961,63.83 r180 bottom (schematic designator L9)
L9_SFP_DP3 "Inductor" INDC2012-0805 145.44,63.83 r180 bottom (schematic designator L9)
L9_SFP_DP4 "Inductor" INDC2012-0805 167.538,63.83 r180 bottom (schematic designator L9)
L9_SFP_DP5 "Inductor" INDC2012-0805 189.636,63.83 r180 bottom (schematic designator L9)
L9_SFP_DP6 "Inductor" INDC2012-0805 211.734,63.83 r180 bottom (schematic designator L9)
L9_SFP_DP7 "Inductor" INDC2012-0805 234.086,63.83 r180 bottom (schematic designator L9)
LD1_SFP_DP0 "Red/Green" LED_DIALIGHT_571-0112-100F 53.315,30.836 r90 top (schematic designator LD1)
LD1_SFP_DP1 "Red/Green" LED_DIALIGHT_571-0112-100F 75.413,30.836 r90 top (schematic designator LD1)
LD1_SFP_DP2 "Red/Green" LED_DIALIGHT_571-0112-100F 110.211,30.836 r90 top (schematic designator LD1)
LD1_SFP_DP3 "Red/Green" LED_DIALIGHT_571-0112-100F 132.69,30.836 r90 top (schematic designator LD1)
LD1_SFP_DP4 "Red/Green" LED_DIALIGHT_571-0112-100F 154.788,30.836 r90 top (schematic designator LD1)
LD1_SFP_DP5 "Red/Green" LED_DIALIGHT_571-0112-100F 176.886,30.836 r90 top (schematic designator LD1)
LD1_SFP_DP6 "Red/Green" LED_DIALIGHT_571-0112-100F 198.984,30.836 r90 top (schematic designator LD1)
LD1_SFP_DP7 "Red/Green" LED_DIALIGHT_571-0112-100F 221.336,30.836 r90 top (schematic designator LD1)
Q1 "FDT434P" SOT223-4L 115.367,182.601 r90 top
Q2 "BC847B" SOT-23 109.22,177.825 r0 top
R1 "10k" RESC1608X55N 88.798,197.231 r270 top
R2 "10k" RESC1608X55N 86.843,197.256 r270 top
R3 "10k" RESC1608X55N 101.321,72.009 r0 top
R4 "10k" RESC1608X55N 101.346,73.99 r0 top
R5 "220k" RESC1608X55N 113.03,164.033 r0 bottom
R6 "10k" RESC1608X55N 114.681,176.911 r0 top
R9_SFP_DP0 "330" RESC1608X55N 54.813,42.977 r270 top (schematic designator R9)
R9_SFP_DP1 "330" RESC1608X55N 76.911,42.977 r270 top (schematic designator R9)
R9_SFP_DP2 "330" RESC1608X55N 111.709,42.977 r270 top (schematic designator R9)
R9_SFP_DP3 "330" RESC1608X55N 134.188,42.977 r270 top (schematic designator R9)
R9_SFP_DP4 "330" RESC1608X55N 156.286,42.977 r270 top (schematic designator R9)
R9_SFP_DP5 "330" RESC1608X55N 178.384,42.977 r270 top (schematic designator R9)
R9_SFP_DP6 "330" RESC1608X55N 200.482,42.977 r270 top (schematic designator R9)
R9_SFP_DP7 "330" RESC1608X55N 222.834,42.977 r270 top (schematic designator R9)
R10_SFP_DP0 "330" RESC1608X55N 53.111,42.977 r270 top (schematic designator R10)
R10_SFP_DP1 "330" RESC1608X55N 75.209,42.977 r270 top (schematic designator R10)
R10_SFP_DP2 "330" RESC1608X55N 110.007,42.977 r270 top (schematic designator R10)
R10_SFP_DP3 "330" RESC1608X55N 132.486,42.977 r270 top (schematic designator R10)
R10_SFP_DP4 "330" RESC1608X55N 154.584,42.977 r270 top (schematic designator R10)
R10_SFP_DP5 "330" RESC1608X55N 176.682,42.977 r270 top (schematic designator R10)
R10_SFP_DP6 "330" RESC1608X55N 198.78,42.977 r270 top (schematic designator R10)
R10_SFP_DP7 "330" RESC1608X55N 221.132,42.977 r270 top (schematic designator R10)
R11 "10k" RESC1608X55N 109.372,174.854 r0 top
R12 "10k" RESC1608X55N 113.411,203.175 r180 bottom
R21_SFP_DP0 "10k" RESC1608X55N 61.646,58.953 r180 bottom (schematic designator R21)
R21_SFP_DP1 "10k" RESC1608X55N 83.744,58.953 r180 bottom (schematic designator R21)
R21_SFP_DP2 "10k" RESC1608X55N 118.542,58.953 r180 bottom (schematic designator R21)
R21_SFP_DP3 "10k" RESC1608X55N 141.021,58.953 r180 bottom (schematic designator R21)
R21_SFP_DP4 "10k" RESC1608X55N 163.119,58.953 r180 bottom (schematic designator R21)
R21_SFP_DP5 "10k" RESC1608X55N 185.217,58.953 r180 bottom (schematic designator R21)
R21_SFP_DP6 "10k" RESC1608X55N 207.315,58.953 r180 bottom (schematic designator R21)
R21_SFP_DP7 "10k" RESC1608X55N 229.667,58.953 r180 bottom (schematic designator R21)
R22_SFP_DP0 "10k" RESC1608X55N 61.646,57.404 r180 bottom (schematic designator R22)
R22_SFP_DP1 "10k" RESC1608X55N 83.744,57.404 r180 bottom (schematic designator R22)
R22_SFP_DP2 "10k" RESC1608X55N 118.542,57.404 r180 bottom (schematic designator R22)
R22_SFP_DP3 "10k" RESC1608X55N 141.021,57.404 r180 bottom (schematic designator R22)
R22_SFP_DP4 "10k" RESC1608X55N 163.119,57.404 r180 bottom (schematic designator R22)
R22_SFP_DP5 "10k" RESC1608X55N 185.217,57.404 r180 bottom (schematic designator R22)
R22_SFP_DP6 "10k" RESC1608X55N 207.315,57.404 r180 bottom (schematic designator R22)
R22_SFP_DP7 "10k" RESC1608X55N 229.667,57.404 r180 bottom (schematic designator R22)
R70_SFP_DP0 "0*" RESC1608X55N 68.326,58.242 r180 bottom (schematic designator R70)
R70_SFP_DP1 "0*" RESC1608X55N 90.424,58.242 r180 bottom (schematic designator R70)
R70_SFP_DP2 "0*" RESC1608X55N 125.222,58.242 r180 bottom (schematic designator R70)
R70_SFP_DP3 "0*" RESC1608X55N 147.701,58.242 r180 bottom (schematic designator R70)
R70_SFP_DP4 "0*" RESC1608X55N 169.799,58.242 r180 bottom (schematic designator R70)
R70_SFP_DP5 "0*" RESC1608X55N 191.897,58.242 r180 bottom (schematic designator R70)
R70_SFP_DP6 "0*" RESC1608X55N 213.995,58.242 r180 bottom (schematic designator R70)
R70_SFP_DP7 "0*" RESC1608X55N 236.347,58.242 r180 bottom (schematic designator R70)
R71_SFP_DP0 "0*" RESC1608X55N 68.351,56.667 r180 bottom (schematic designator R71)
R71_SFP_DP1 "0*" RESC1608X55N 90.449,56.667 r180 bottom (schematic designator R71)
R71_SFP_DP2 "0*" RESC1608X55N 125.247,56.667 r180 bottom (schematic designator R71)
R71_SFP_DP3 "0*" RESC1608X55N 147.726,56.667 r180 bottom (schematic designator R71)
R71_SFP_DP4 "0*" RESC1608X55N 169.824,56.667 r180 bottom (schematic designator R71)
R71_SFP_DP5 "0*" RESC1608X55N 191.922,56.667 r180 bottom (schematic designator R71)
R71_SFP_DP6 "0*" RESC1608X55N 214.02,56.667 r180 bottom (schematic designator R71)
R71_SFP_DP7 "0*" RESC1608X55N 236.372,56.667 r180 bottom (schematic designator R71)
R76 "10k" RESC1608X55N 121.514,160.553 r270 top
R77 "5k76" RESC1608X55N 118.948,163.043 r0 top
RP1_SFP_DP0 "10k" CAY-16 62.916,51.638 r270 bottom (schematic designator RP1)
RP1_SFP_DP1 "10k" CAY-16 85.014,51.638 r270 bottom (schematic designator RP1)
RP1_SFP_DP2 "10k" CAY-16 119.812,51.638 r270 bottom (schematic designator RP1)
RP1_SFP_DP3 "10k" CAY-16 142.291,51.638 r270 bottom (schematic designator RP1)
RP1_SFP_DP4 "10k" CAY-16 164.389,51.638 r270 bottom (schematic designator RP1)
RP1_SFP_DP5 "10k" CAY-16 186.487,51.638 r270 bottom (schematic designator RP1)
RP1_SFP_DP6 "10k" CAY-16 208.585,51.638 r270 bottom (schematic designator RP1)
RP1_SFP_DP7 "10k" CAY-16 230.937,51.638 r270 bottom (schematic designator RP1)

## Footprints (in the part's own frame and the unit in brackets; to place one, negate y for a bottom-side part, rotate by r counter-clockwise, add the part's x,y. Pads: shape width x height; smd on the part's side, far side on the other; paste and mask are expansions set on the pad)
CAPC1608X87N [mm] "Chip Capacitor, Body 1.6x0.8mm IPC Medium Density"
  rect 0.95x1 smd: 1(-0.8,0) 2(0.8,0)
  silkscreen extent 0,-0.5 0,0.5, body extent -0.87,-0.47 0.88,0.48, height 0.87
CAPC3216X140N [mm] "Chip Capacitor, Body 3.2x1.6mm, IPC Medium Density"
  rect 1.15x1.8 smd: 1(-1.5,0) 2(1.5,0)
  silkscreen extent -0.5,-0.9 0.5,0.9, body extent -1.7,-0.9 1.7,0.9, height 1.4
CAY-16 [mil]
  oval 40x12 smd: 1(0,0) 2(0,-31.5) 3(0,-62.99) 4(0,-94.49) 5(70,-94.49) 6(70,-62.99) 7(70,-31.5) 8(70,0)
  silkscreen extent 0,-110 70,15
CD4532-1812 [mm] "Chip Diode; Body 4.5 x 3.2 mm (LxW typ)"
  rect 1.9x3.4 smd: 1(-1.95,0) 2(1.95,0)
  silkscreen extent -0.7,-1.6 0.7,1.6
CON_3.96_2 [mm]
  rect 3x3 hole 1.7: 1(0,0)
  round 3 hole 1.7: 2(3.96,0)
  silkscreen extent -1.98,-2.5 5.94,1.98
CON_AMC_MOLEX_75800_00001_REVERSE [mm] "Molex AMC right-angle connector (pins reversed for the MCH)"
  round 1.1 hole 0.7: 1(-31.5,7.6) 2(-30.375,6.5) 3(-30.375,4.9) 4(-29.25,7.6) 5(-28.125,6.5) 6(-28.125,4.9) 7(-27,7.6) 8(-25.875,6.5) 9(-25.875,4.9) 10(-24.75,7.6) 11(-23.625,6.5) 12(-23.625,4.9) 13(-22.5,7.6) 14(-21.375,6.5) 15(-21.375,4.9) 16(-20.25,7.6) 17(-19.125,6.5) 18(-19.125,4.9) 19(-18,7.6) 20(-16.875,6.5) 21(-16.875,4.9) 22(-15.75,7.6) 23(-14.625,6.5) 24(-14.625,4.9) 25(-13.5,7.6) 26(-12.375,6.5) 27(-12.375,4.9) 28(-11.25,7.6) 29(-10.125,6.5) 30(-10.125,4.9) 31(-9,7.6) 32(-7.875,6.5) 33(-7.875,4.9) 34(-6.75,7.6) 35(-5.625,6.5) 36(-5.625,4.9) 37(-4.5,7.6) 38(-3.375,6.5) 39(-3.375,4.9) 40(-2.25,7.6) 41(-1.125,6.5) 42(-1.125,4.9) 43(0,7.6) 44(1.125,6.5) 45(1.125,4.9) 46(2.25,7.6) 47(3.375,6.5) 48(3.375,4.9) 49(4.5,7.6) 50(5.625,6.5) 51(5.625,4.9) 52(6.75,7.6) 53(7.875,6.5) 54(7.875,4.9) 55(9,7.6) 56(10.125,6.5) 57(10.125,4.9) 58(11.25,7.6) 59(12.375,6.5) 60(12.375,4.9) 61(13.5,7.6) 62(14.625,6.5) 63(14.625,4.9) 64(15.75,7.6) 65(16.875,6.5) 66(16.875,4.9) 67(18,7.6) 68(19.125,6.5) 69(19.125,4.9) 70(20.25,7.6) 71(21.375,6.5) 72(21.375,4.9) 73(22.5,7.6) 74(23.625,6.5) 75(23.625,4.9) 76(24.75,7.6) 77(25.875,6.5) 78(25.875,4.9) 79(27,7.6) 80(28.125,6.5) 81(28.125,4.9) 82(29.25,7.6) 83(30.375,6.5) 84(30.375,4.9) 85(31.5,7.6) 86(31.5,3.8) 86A(31.5,0) 87(30.375,1.1) 88(30.375,2.7) 89(29.25,3.8) 89A(29.25,0) 90(28.125,1.1) 91(28.125,2.7) 92(27,3.8) 92A(27,0) 93(25.875,1.1) 94(25.875,2.7) 95(24.75,3.8) 95A(24.75,0) 96(23.625,1.1) 97(23.625,2.7) 98(22.5,3.8) 98A(22.5,0) 99(21.375,1.1) 100(21.375,2.7) 101(20.25,3.8) 101A(20.25,0) 102(19.125,1.1) 103(19.125,2.7) 104(18,3.8) 104A(18,0) 105(16.875,1.1) 106(16.875,2.7) 107(15.75,3.8) 107A(15.75,0) 108(14.625,1.1) 109(14.625,2.7) 110(13.5,3.8) 110A(13.5,0) 111(12.375,1.1) 112(12.375,2.7) 113(11.25,3.8) 113A(11.25,0) 114(10.125,1.1) 115(10.125,2.7) 116(9,3.8) 116A(9,0) 117(7.875,1.1) 118(7.875,2.7) 119(6.75,3.8) 119A(6.75,0) 120(5.625,1.1) 121(5.625,2.7) 122(4.5,3.8) 122A(4.5,0) 123(3.375,1.1) 124(3.375,2.7) 125(2.25,3.8) 125A(2.25,0) 126(1.125,1.1) 127(1.125,2.7) 128(0,3.8) 128A(0,0) 129(-1.125,1.1) 130(-1.125,2.7) 131(-2.25,3.8) 131A(-2.25,0) 132(-3.375,1.1) 133(-3.375,2.7) 134(-4.5,3.8) 134A(-4.5,0) 135(-5.625,1.1) 136(-5.625,2.7) 137(-6.75,3.8) 137A(-6.75,0) 138(-7.875,1.1) 139(-7.875,2.7) 140(-9,3.8) 140A(-9,0) 141(-10.125,1.1) 142(-10.125,2.7) 143(-11.25,3.8) 143A(-11.25,0) 144(-12.375,1.1) 145(-12.375,2.7) 146(-13.5,3.8) 146A(-13.5,0) 147(-14.625,1.1) 148(-14.625,2.7) 149(-15.75,3.8) 149A(-15.75,0) 150(-16.875,1.1) 151(-16.875,2.7) 152(-18,3.8) 152A(-18,0) 153(-19.125,1.1) 154(-19.125,2.7) 155(-20.25,3.8) 155A(-20.25,0) 156(-21.375,1.1) 157(-21.375,2.7) 158(-22.5,3.8) 158A(-22.5,0) 159(-23.625,1.1) 160(-23.625,2.7) 161(-24.75,3.8) 161A(-24.75,0) 162(-25.875,1.1) 163(-25.875,2.7) 164(-27,3.8) 164A(-27,0) 165(-28.125,1.1) 166(-28.125,2.7) 167(-29.25,3.8) 168(-30.375,1.1) 169(-30.375,2.7) 170(-31.5,3.8) 170A(-31.5,0) nc(-29.25,0)
  round 2.9 hole 2.9: M1(-34.75,2.2) M2(34.75,2.2)
  round 7 hole 7: M3(-37.5,8.2) M4(37.5,8.2)
  silkscreen extent -37.5,-5.2 37.5,8.35
IND0943-B [mm]
  rect 3.1x5.6 smd: 1(1.6,0) 2(11.5,0)
  silkscreen extent 0.3,-6.3 12.8,6.3
INDC2012-0805 [mm] "Chip Inductor; Body 2 x 1.2 mm (LxW typ)"
  rect 1x1.2 smd: 1(-1,0) 2(1,0)
  silkscreen extent -0.2,-0.5 0.2,0.5
LED_DIALIGHT_571-0112-100F [mm] "2x 2mm LED (Top: Red, Bot: Green) PCB Edge Mounting (With positioning pins) DIALIGHT 571 Serie"
  round 1.7 hole 1: 1(0,0) 2(2.54,0) 3(5.08,0) 4(7.62,0)
  silkscreen extent -6.35,-2.52 8.89,1.25, body extent -6.35,-2.52 8.89,1.25, height 8.6
OSCON_F12 [mm]
  rect 4.4x1.9 smd: 1(-4.35,0) 2(4.35,0)
  silkscreen extent -5.3,-5.2 5,5.1
RESC1608X55N [mm] "Chip Resistor, EIA 0603, Metric 1608, Body 1.6x0.8mm, IPC Medium Density"
  rect 0.9x1 smd: 1(-0.8,0) 2(0.8,0)
  silkscreen extent 0,-0.5 0,0.5, body extent -0.87,-0.47 0.88,0.48, height 0.55
SFP_SINGLE_PORT [mm]
  rect 0.5x2 smd: 1(3.73,-3.2) 2(4.53,-3.2) 3(5.33,-3.2) 4(6.13,-3.2) 5(6.93,-3.2) 6(7.73,-3.2) 7(8.53,-3.2) 8(9.33,-3.2) 9(10.13,-3.2) 10(10.93,-3.2) 11(10.53,5) 12(9.73,5) 13(8.93,5) 14(8.13,5) 15(7.33,5) 16(6.53,5) 17(5.73,5) 18(4.93,5) 19(4.13,5) 20(3.33,5)
  rect 2x2 hole 1.3: 21(0,0) 22(14.25,5) 23(14.25,-5) 24(0,-10) 25(5.68,-10) 26(11.08,-10) 27(14.25,-15) 28(0,-20) 29(14.25,-25) 30(0,-30) 31(8.58,-30)
  round 0.9 hole 0.9 unplated: ""(0,-7.2) ""(0,-2.5) ""(0,2.5) ""(2.33,7.1) ""(7.13,7.1) ""(11.93,7.1) ""(14.25,-7.2) ""(14.25,-2.5) ""(14.25,2.5)
  round 1.6 hole 1.6 unplated: ""(2.33,0.9) ""(11.93,0.9)
  Top Layer pour cut-out: 1.016,6.858 3.556,6.858 3.556,7.874 5.461,7.874 5.461,6.858 8.382,6.858 8.382,7.874 10.287,7.874 10.287,6.858 13.208,6.858 13.208,-7.747 1.016,-7.747
  Top Layer keep-out region: 1.524,1.905 2.794,1.905 2.794,4.572 1.524,4.572
  Top Layer keep-out region: 1.524,-3.302 3.048,-3.302 3.048,-0.127 1.524,-0.127
  Top Layer keep-out region: 11.43,-3.302 12.7,-3.302 12.7,-0.127 11.43,-0.127
  Top Layer keep-out region: 11.176,1.905 12.7,1.905 12.7,4.572 11.176,4.572
  silkscreen extent -1.14,-34.42 15.37,7.87
SOIC127P600-8AL [mm] "SOIC, 8-Leads, Body 4.9x3.9mm, Pitch 1.27mm, IPC High Density"
  oval 1.7x0.6 smd: 1(-2.45,1.905) 2(-2.45,0.635) 3(-2.45,-0.635) 4(-2.45,-1.905) 5(2.45,-1.905) 6(2.45,-0.635) 7(2.45,0.635) 8(2.45,1.905)
  silkscreen extent -2.57,-2.5 1.2,2.88, body extent -2,-2.5 2,2.5, height 2.72
SOIC127P600-8AL_POWERPAD [mm] "SOIC, 8-Leads, Body 4.9x3.9mm, Pitch 1.27mm, IPC High Density"
  oval 1.7x0.6 smd: 1(-2.45,1.905) 2(-2.45,0.635) 3(-2.45,-0.635) 4(-2.45,-1.905) 5(2.45,-1.905) 6(2.45,-0.635) 7(2.45,0.635) 8(2.45,1.905)
  rect 2.489x2.997 smd: PAD(0,0)
  silkscreen extent -2.58,-2.5 1.2,2.88, body extent -2,-2.5 2,2.5, height 2.72
SOT223-4L [mm] "SOT223, 4-Leads, Body 6.5x3.5mm, Pitch 2.3mm, Lead Span 7mm, IPC High Density"
  rect 2.1x0.9 smd: 1(-2.85,2.3) 2(-2.85,0) 3(-2.85,-2.3)
  rect 2.1x3.2 smd: 4(2.85,0)
  silkscreen extent -2.98,-3.35 1.5,3.42, body extent -1.85,-3.35 1.85,3.35, height 1.8
SOT-23 [mm] "SOT-23; 3 Leads; Body 3.0 x 2.6 mm, inc. leads (LxW max)"
  rect 0.9x0.95 smd: 1(-0.95,-1.25) 2(0.95,-1.25) 3(0,1.25)
  silkscreen extent -2.07,-1.37 1.3,1.25
TSOP65P640-16AM [mm] "TSOP, 16-Leads, Body 5x4.4mm, Pitch 0.65mm, IPC Low Density"
  oval 2x0.35 smd: 1(-2.9,2.275) 2(-2.9,1.625) 3(-2.9,0.975) 4(-2.9,0.325) 5(-2.9,-0.325) 6(-2.9,-0.975) 7(-2.9,-1.625) 8(-2.9,-2.275) 9(2.9,-2.275) 10(2.9,-1.625) 11(2.9,-0.975) 12(2.9,-0.325) 13(2.9,0.325) 14(2.9,0.975) 15(2.9,1.625) 16(2.9,2.275)
  silkscreen extent -3.03,-2.55 1.5,3.12, body extent -2.25,-2.55 2.25,2.55, height 1.1
TSOP65P640-24AL [mm] "TSOP, 24-Leads, Body 7.8x4.4mm, Pitch 0.65mm, IPC High Density"
  oval 1.4x0.35 smd: 1(-2.8,3.575) 2(-2.8,2.925) 3(-2.8,2.275) 4(-2.8,1.625) 5(-2.8,0.975) 6(-2.8,0.325) 7(-2.8,-0.325) 8(-2.8,-0.975) 9(-2.8,-1.625) 10(-2.8,-2.275) 11(-2.8,-2.925) 12(-2.8,-3.575) 13(2.8,-3.575) 14(2.8,-2.925) 15(2.8,-2.275) 16(2.8,-1.625) 17(2.8,-0.975) 18(2.8,-0.325) 19(2.8,0.325) 20(2.8,0.975) 21(2.8,1.625) 22(2.8,2.275) 23(2.8,2.925) 24(2.8,3.575)
  silkscreen extent -2.92,-3.95 1.7,4.42, body extent -2.25,-3.95 2.25,3.95, height 1.1

## Part data
C46 C48 C73_SFP_DP0 C73_SFP_DP1 C73_SFP_DP2 C73_SFP_DP3 C73_SFP_DP4 C73_SFP_DP5 C73_SFP_DP6 C73_SFP_DP7 C74_SFP_DP0 C74_SFP_DP1 C74_SFP_DP2 C74_SFP_DP3 C74_SFP_DP4 C74_SFP_DP5 C74_SFP_DP6 C74_SFP_DP7 C84: library part CC0603_10NF_50V_10%_X7R, "Non-polarised capacitor"
C75 C76 C77 C78 C79_SFP_DP0 C79_SFP_DP1 C79_SFP_DP2 C79_SFP_DP3 C79_SFP_DP4 C79_SFP_DP5 C79_SFP_DP6 C79_SFP_DP7 C80_SFP_DP0 C80_SFP_DP1 C80_SFP_DP2 C80_SFP_DP3 C80_SFP_DP4 C80_SFP_DP5 C80_SFP_DP6 C80_SFP_DP7 C81_SFP_DP0 C81_SFP_DP1 C81_SFP_DP2 C81_SFP_DP3 C81_SFP_DP4 C81_SFP_DP5 C81_SFP_DP6 C81_SFP_DP7 C90 C118_SFP_DP0 C118_SFP_DP1 C118_SFP_DP2 C118_SFP_DP3 C118_SFP_DP4 C118_SFP_DP5 C118_SFP_DP6 C118_SFP_DP7 C121 C121_SFP_DP0 C121_SFP_DP1 C121_SFP_DP2 C121_SFP_DP3 C121_SFP_DP4 C121_SFP_DP5 C121_SFP_DP6 C121_SFP_DP7 C123_SFP_DP0 C123_SFP_DP1 C123_SFP_DP2 C123_SFP_DP3 C123_SFP_DP4 C123_SFP_DP5 C123_SFP_DP6 C123_SFP_DP7: library part CC0603_100NF_50V_10%_X7R, "Non-polarised capacitor"
C85: library part "Cap Pol1", "Polarized Capacitor (Radial)"
C86 C87 C88 C89: library part CC1206_10UF_16V_10%_X7R, "Non-polarised capacitor"
C91: library part CC0603_1UF_16V_10%_X7R, "Non-polarised capacitor"
C92 C93: library part CC1206_1UF_16V_10%_X7R, "Non-polarised capacitor"
C117_SFP_DP0 C117_SFP_DP1 C117_SFP_DP2 C117_SFP_DP3 C117_SFP_DP4 C117_SFP_DP5 C117_SFP_DP6 C117_SFP_DP7 C120_SFP_DP0 C120_SFP_DP1 C120_SFP_DP2 C120_SFP_DP3 C120_SFP_DP4 C120_SFP_DP5 C120_SFP_DP6 C120_SFP_DP7 C122_SFP_DP0 C122_SFP_DP1 C122_SFP_DP2 C122_SFP_DP3 C122_SFP_DP4 C122_SFP_DP5 C122_SFP_DP6 C122_SFP_DP7: library part CC1206_10UF_10V_10%_X7R, "Non-polarised capacitor"
CN1: library part UTCA_MCH_SOCKET, "microTCA MTCA.0  MCH socket (AMC0.0 B+ connector with reversed pins)"
CN2: library part "Header 2", "Header, 2-Pin"
CN8_SFP_DP0 CN8_SFP_DP1 CN8_SFP_DP2 CN8_SFP_DP3 CN8_SFP_DP4 CN8_SFP_DP5 CN8_SFP_DP6 CN8_SFP_DP7: library part SFP_SOCKET_SINGLE, "Socket for SFP module"
D1: library part "D Schottky", "Schottky Diode"
IC4: "1-to-8 I2C bus mux"
IC5 IC6 IC7 IC9_SFP_DP0 IC9_SFP_DP1 IC9_SFP_DP2 IC9_SFP_DP3 IC9_SFP_DP4 IC9_SFP_DP5 IC9_SFP_DP6 IC9_SFP_DP7 IC10_SFP_DP0 IC10_SFP_DP1 IC10_SFP_DP2 IC10_SFP_DP3 IC10_SFP_DP4 IC10_SFP_DP5 IC10_SFP_DP6 IC10_SFP_DP7 IC13: "LVDS buffer with enable"
IC8: library part PCA9534, "8-bit I2C I/O expander"
IC8_SFP_DP0 IC8_SFP_DP1 IC8_SFP_DP2 IC8_SFP_DP3 IC8_SFP_DP4 IC8_SFP_DP5 IC8_SFP_DP6 IC8_SFP_DP7: "8-bit I2C I/O expander"
IC11: "Step-down switchmode converter"
IC12: library part 1117, "Three-Terminal Adjustable Output Positive Voltage Regulator"
L1: library part Inductor, "Inductor"
L8_SFP_DP0 L8_SFP_DP1 L8_SFP_DP2 L8_SFP_DP3 L8_SFP_DP4 L8_SFP_DP5 L8_SFP_DP6 L8_SFP_DP7 L9_SFP_DP0 L9_SFP_DP1 L9_SFP_DP2 L9_SFP_DP3 L9_SFP_DP4 L9_SFP_DP5 L9_SFP_DP6 L9_SFP_DP7: "Ferrite bead"
LD1_SFP_DP0 LD1_SFP_DP1 LD1_SFP_DP2 LD1_SFP_DP3 LD1_SFP_DP4 LD1_SFP_DP5 LD1_SFP_DP6 LD1_SFP_DP7: library part LED_DIALIGHT_571-0112-100F, "2x LED  Botom Green, Top Red"
Q1: library part Q_FDT434P, "P-Channel MOSFET"
Q2: library part Q_BC847B, "Transistor"
R1 R2 R3 R4 R6 R11 R12 R21_SFP_DP0 R21_SFP_DP1 R21_SFP_DP2 R21_SFP_DP3 R21_SFP_DP4 R21_SFP_DP5 R21_SFP_DP6 R21_SFP_DP7 R22_SFP_DP0 R22_SFP_DP1 R22_SFP_DP2 R22_SFP_DP3 R22_SFP_DP4 R22_SFP_DP5 R22_SFP_DP6 R22_SFP_DP7 R76: library part R0603_10K_1%_0.1W_100PPM, "Resistor - 1%"
R5: library part R0603_220K_1%_0.1W_100PPM, "Resistor - 1%"
R9_SFP_DP0 R9_SFP_DP1 R9_SFP_DP2 R9_SFP_DP3 R9_SFP_DP4 R9_SFP_DP5 R9_SFP_DP6 R9_SFP_DP7 R10_SFP_DP0 R10_SFP_DP1 R10_SFP_DP2 R10_SFP_DP3 R10_SFP_DP4 R10_SFP_DP5 R10_SFP_DP6 R10_SFP_DP7: library part R0603_330R_1%_0.1W_100PPM, "Resistor - 1%"
R70_SFP_DP0 R70_SFP_DP1 R70_SFP_DP2 R70_SFP_DP3 R70_SFP_DP4 R70_SFP_DP5 R70_SFP_DP6 R70_SFP_DP7 R71_SFP_DP0 R71_SFP_DP1 R71_SFP_DP2 R71_SFP_DP3 R71_SFP_DP4 R71_SFP_DP5 R71_SFP_DP6 R71_SFP_DP7: library part R0603_0R_JUMPER, "Resistor - 1%"
R77: library part R0603_5K76_0.1%_0.063W_10PPM, "Resistor - 0.1%"
RP1_SFP_DP0 RP1_SFP_DP1 RP1_SFP_DP2 RP1_SFP_DP3 RP1_SFP_DP4 RP1_SFP_DP5 RP1_SFP_DP6 RP1_SFP_DP7: library part RES_ARRAY_1206, "Resistor network 1206 (4x0402) Maritex RAC4Xxxx"

## Free pads (board coordinates)
  rect 0.48x3.3 on Mech15 paste-5.08: 1(38.468,204.171) 2(39.218,204.171) 4(40.718,204.171) 7(42.968,204.171) 9(44.468,204.171) 10(45.218,204.171) 13(47.468,204.171) 16(49.718,204.171) 18(51.218,204.171) 19(51.968,204.171) 22(54.218,204.171) 25(56.468,204.171) 27(57.968,204.171) 28(58.718,204.171) 31(60.968,204.171) 34(63.218,204.171) 37(65.468,204.171) 40(67.718,204.171) 42(69.218,204.171) 43(69.968,204.171) 46(72.218,204.171) 49(74.468,204.171) 52(76.718,204.171) 55(78.968,204.171) 57(80.468,204.171) 58(81.218,204.171) 61(83.468,204.171) 64(85.718,204.171) 67(87.968,204.171) 70(90.218,204.171) 72(91.718,204.171) 73(92.468,204.171) 76(94.718,204.171) 79(96.968,204.171) 82(99.218,204.171) 84(100.718,204.171) 85(101.468,204.171) 86(101.468,204.171) 89(99.218,204.171) 92(96.968,204.171) 95(94.718,204.171) 98(92.468,204.171) 101(90.218,204.171) 104(87.968,204.171) 107(85.718,204.171) 110(83.468,204.171) 113(81.218,204.171) 116(78.968,204.171) 119(76.718,204.171) 122(74.468,204.171) 125(72.218,204.171) 128(69.968,204.171) 131(67.718,204.171) 134(65.468,204.171) 137(63.218,204.171) 140(60.968,204.171) 143(58.718,204.171) 146(56.468,204.171) 149(54.218,204.171) 152(51.968,204.171) 155(49.718,204.171) 158(47.468,204.171) 161(45.218,204.171) 164(42.968,204.171) 170(38.468,204.171)
  rect 0.48x0.95 on Mech15 paste-5.08: 2mate(41.468,205.346) 2mate(42.218,205.346) 2mate(43.718,205.346) 2mate(50.468,205.346) 2mate(57.218,205.346) 2mate(68.468,205.346) 2mate(79.718,205.346) 2mate(90.968,205.346)
  rect 0.48x1.1 on Mech15 paste-5.08: 3(39.968,203.071) 83(99.968,203.071)
  rect 0.48x1.7 on Mech15 paste-5.08: 3mate(39.218,204.971) 3mate(39.968,204.971) 3mate(40.718,204.971) 3mate(41.468,204.971) 3mate(42.218,204.971) 3mate(43.718,204.971) 3mate(44.468,204.971) 3mate(45.968,204.971) 3mate(45.968,204.971) 3mate(46.718,204.971) 3mate(46.718,204.971) 3mate(48.218,204.971) 3mate(48.218,204.971) 3mate(48.968,204.971) 3mate(48.968,204.971) 3mate(50.468,204.971) 3mate(51.218,204.971) 3mate(52.718,204.971) 3mate(52.718,204.971) 3mate(53.468,204.971) 3mate(53.468,204.971) 3mate(54.968,204.971) 3mate(54.968,204.971) 3mate(55.718,204.971) 3mate(55.718,204.971) 3mate(57.218,204.971) 3mate(57.968,204.971) 3mate(59.468,204.971) 3mate(59.468,204.971) 3mate(60.218,204.971) 3mate(60.218,204.971) 3mate(61.718,204.971) 3mate(61.718,204.971) 3mate(62.468,204.971) 3mate(62.468,204.971) 3mate(63.968,204.971) 3mate(63.968,204.971) 3mate(64.718,204.971) 3mate(64.718,204.971) 3mate(66.218,204.971) 3mate(66.218,204.971) 3mate(66.968,204.971) 3mate(66.968,204.971) 3mate(68.468,204.971) 3mate(69.218,204.971) 3mate(70.718,204.971) 3mate(70.718,204.971) 3mate(71.468,204.971) 3mate(71.468,204.971) 3mate(72.968,204.971) 3mate(72.968,204.971) 3mate(73.718,204.971) 3mate(73.718,204.971) 3mate(75.218,204.971) 3mate(75.218,204.971) 3mate(75.968,204.971) 3mate(75.968,204.971) 3mate(77.468,204.971) 3mate(77.468,204.971) 3mate(78.218,204.971) 3mate(78.218,204.971) 3mate(79.718,204.971) 3mate(80.468,204.971) 3mate(81.968,204.971) 3mate(81.968,204.971) 3mate(82.718,204.971) 3mate(82.718,204.971) 3mate(84.218,204.971) 3mate(84.218,204.971) 3mate(84.968,204.971) 3mate(84.968,204.971) 3mate(86.468,204.971) 3mate(86.468,204.971) 3mate(87.218,204.971) 3mate(87.218,204.971) 3mate(88.718,204.971) 3mate(88.718,204.971) 3mate(89.468,204.971) 3mate(89.468,204.971) 3mate(90.968,204.971) 3mate(91.718,204.971) 3mate(93.218,204.971) 3mate(93.218,204.971) 3mate(93.968,204.971) 3mate(93.968,204.971) 3mate(95.468,204.971) 3mate(95.468,204.971) 3mate(96.218,204.971) 3mate(96.218,204.971) 3mate(97.718,204.971) 3mate(97.718,204.971) 3mate(98.468,204.971) 3mate(98.468,204.971) 3mate(99.968,204.971) 3mate(100.718,204.971)
  rect 0.48x2.15 on Mech15 paste-5.08: 5(41.468,203.596) 6(42.218,203.596) 8(43.718,203.596) 17(50.468,203.596) 26(57.218,203.596) 41(68.468,203.596) 56(79.718,203.596) 71(90.968,203.596)
  rect 0.48x1.4 on Mech15 paste-5.08: 11(45.968,203.221) 12(46.718,203.221) 14(48.218,203.221) 15(48.968,203.221) 20(52.718,203.221) 21(53.468,203.221) 23(54.968,203.221) 24(55.718,203.221) 29(59.468,203.221) 30(60.218,203.221) 32(61.718,203.221) 33(62.468,203.221) 35(63.968,203.221) 36(64.718,203.221) 38(66.218,203.221) 39(66.968,203.221) 44(70.718,203.221) 45(71.468,203.221) 47(72.968,203.221) 48(73.718,203.221) 50(75.218,203.221) 51(75.968,203.221) 53(77.468,203.221) 54(78.218,203.221) 59(81.968,203.221) 60(82.718,203.221) 62(84.218,203.221) 63(84.968,203.221) 65(86.468,203.221) 66(87.218,203.221) 68(88.718,203.221) 69(89.468,203.221) 74(93.218,203.221) 75(93.968,203.221) 77(95.468,203.221) 78(96.218,203.221) 80(97.718,203.221) 81(98.468,203.221) 87(100.718,203.221) 88(99.968,203.221) 90(98.468,203.221) 91(97.718,203.221) 93(96.218,203.221) 94(95.468,203.221) 96(93.968,203.221) 97(93.218,203.221) 99(91.718,203.221) 100(90.968,203.221) 102(89.468,203.221) 103(88.718,203.221) 105(87.218,203.221) 106(86.468,203.221) 108(84.968,203.221) 109(84.218,203.221) 111(82.718,203.221) 112(81.968,203.221) 114(80.468,203.221) 115(79.718,203.221) 117(78.218,203.221) 118(77.468,203.221) 120(75.968,203.221) 121(75.218,203.221) 123(73.718,203.221) 124(72.968,203.221) 126(71.468,203.221) 127(70.718,203.221) 129(69.218,203.221) 130(68.468,203.221) 132(66.968,203.221) 133(66.218,203.221) 135(64.718,203.221) 136(63.968,203.221) 138(62.468,203.221) 138(62.468,203.221) 139(61.718,203.221) 141(60.218,203.221) 142(59.468,203.221) 144(57.968,203.221) 145(57.218,203.221) 147(55.718,203.221) 148(54.968,203.221) 150(53.468,203.221) 151(52.718,203.221) 153(51.218,203.221) 154(50.468,203.221) 156(48.968,203.221) 157(48.218,203.221) 159(46.718,203.221) 160(45.968,203.221) 162(44.468,203.221) 163(43.718,203.221) 165(42.218,203.221) 166(41.468,203.221) 167(40.718,203.221) 168(39.968,203.221) 169(39.218,203.221)
  rect 4.7x4.7 hole 2.7: ESD_STRIP_SEGMENT_3(104.068,46.521)
  rect 0.48x2 on Mech15 paste-5.08: lmate(39.968,204.821) lmate(99.968,204.821)
  round 6.5 hole 3.5: MOUNT(28,38) MOUNT(28,196) MOUNT(118,124) MOUNT(118,196) MOUNT(246,38) MOUNT(246,112)
  rect 4x4 hole 2.7: ""(36.468,29.771)
  round 6 hole 3: ""(38.468,66.521) ""(101.468,66.521)
  round 5.5 hole 3: ""(38.468,171.521) ""(38.468,188.521) ""(101.468,171.521) ""(101.468,188.521)

## Via types
v1: diameter 0.66, hole 0.305, Top Layer to Bottom Layer, tented both sides, 576 vias
v2: diameter 0.711, hole 0.33, Top Layer to Bottom Layer, tented both sides, 97 vias
v3: diameter 0.66, hole 0.305, Top Layer to Bottom Layer, 3 vias